# Altium PCB pcb_board4_final.PcbDoc
Units mil, origin at the board's own origin, x right, y up, seen from the top; angles counter-clockwise.
Board outline 2500 x 3000 mil, 4 copper layers (Top Layer, Int1 (GND), Int2 (GND), Bottom Layer), stack 53.912 mil thick; 87 components, 49 nets, 293 pads, 67 vias.
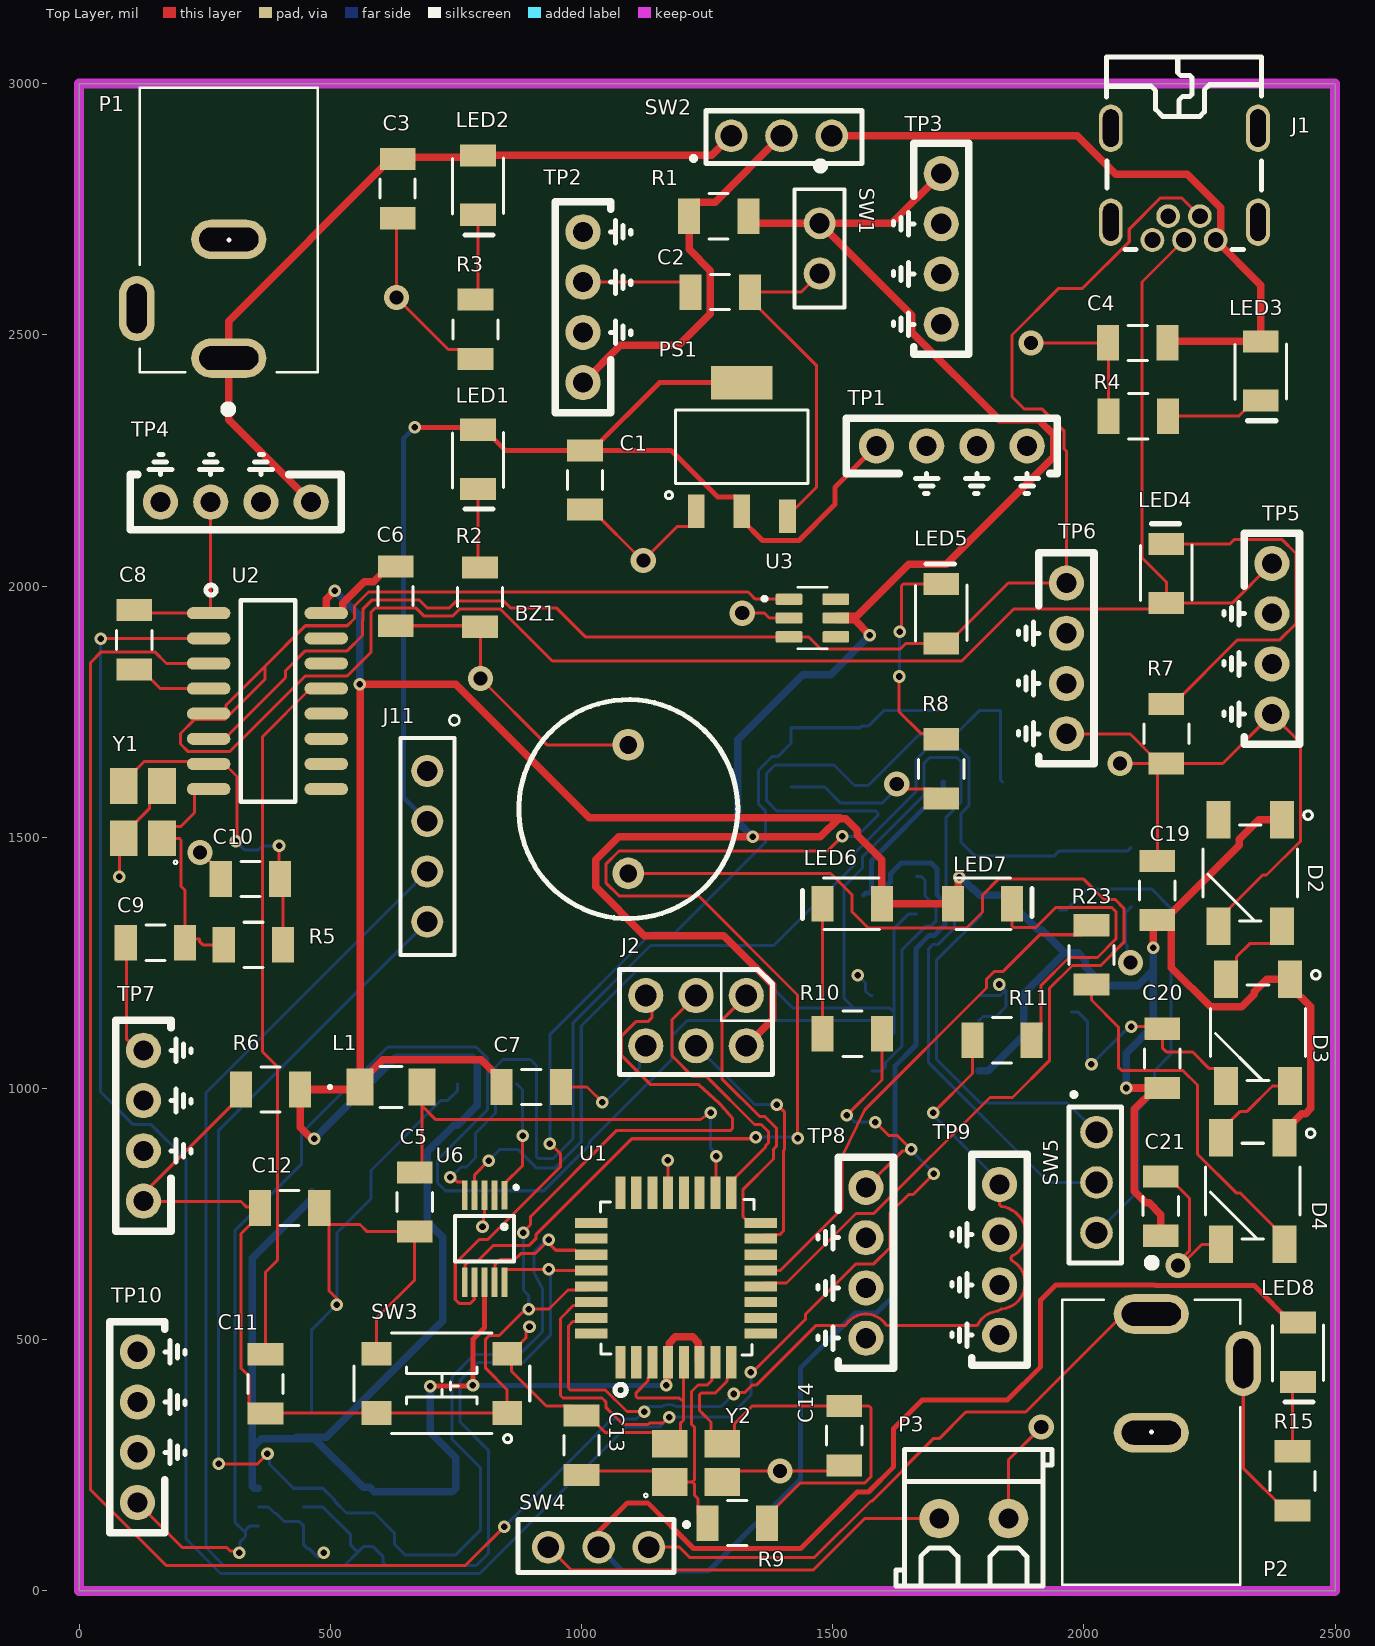
[diagram p0: Top Layer view]
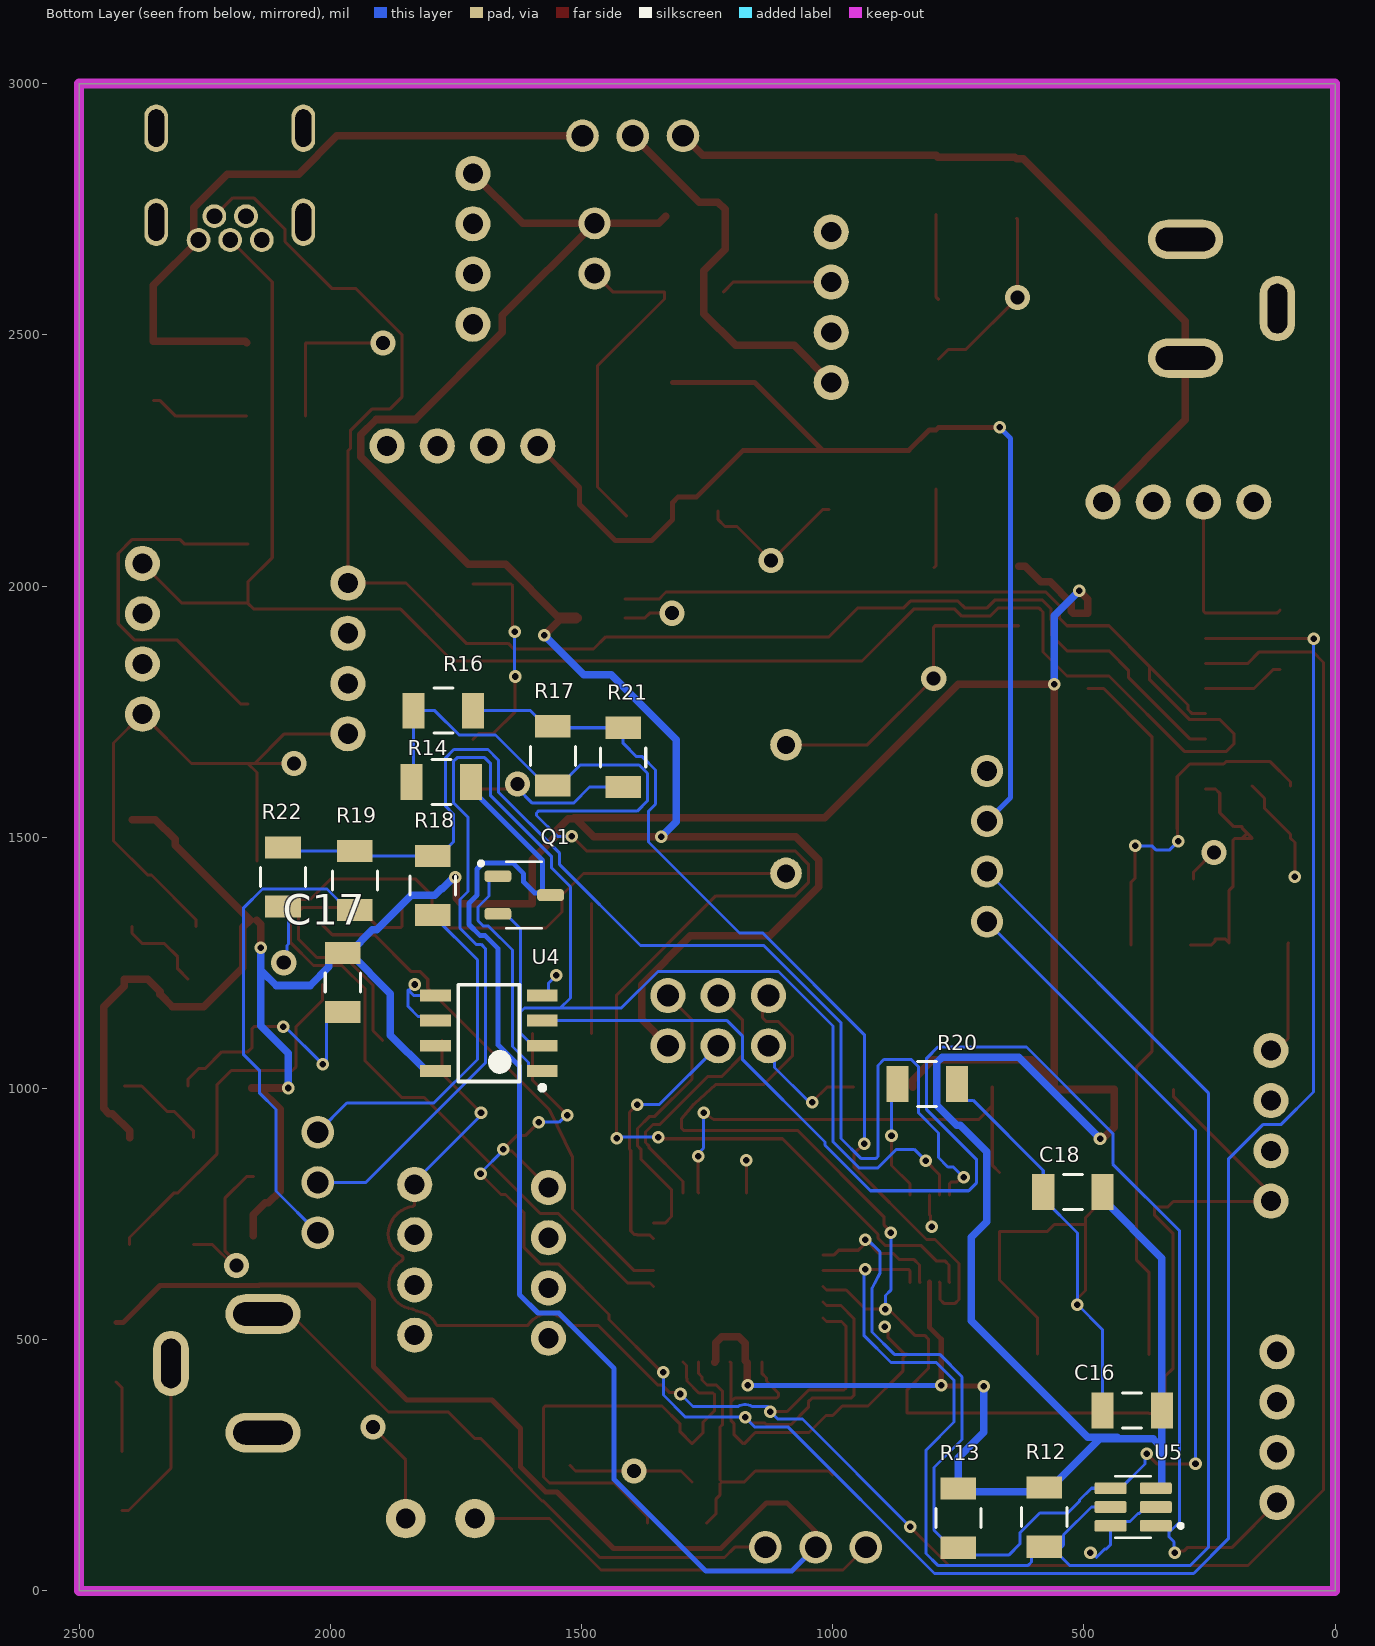
[diagram p1: Bottom Layer view, seen from below]
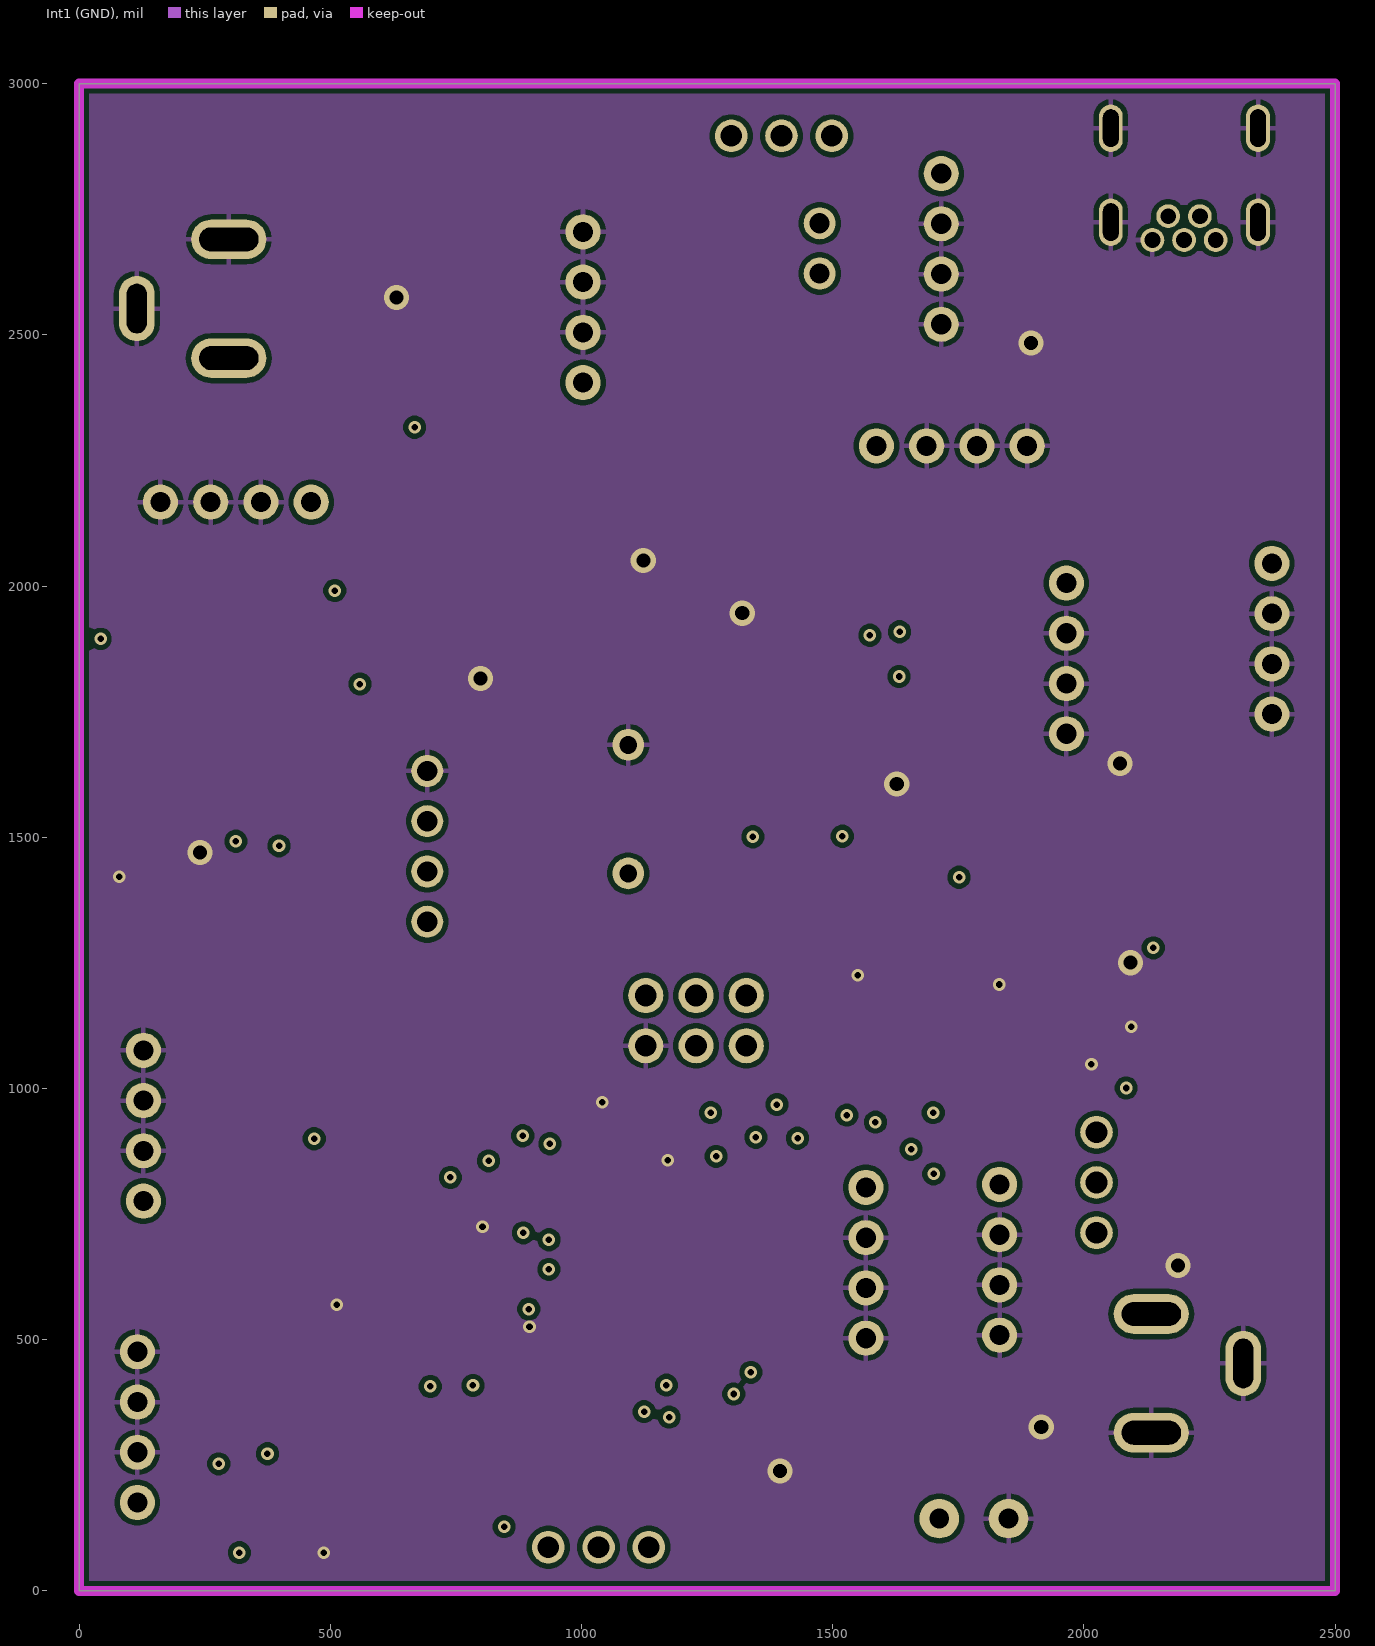
[diagram p2: Int1 (GND)]
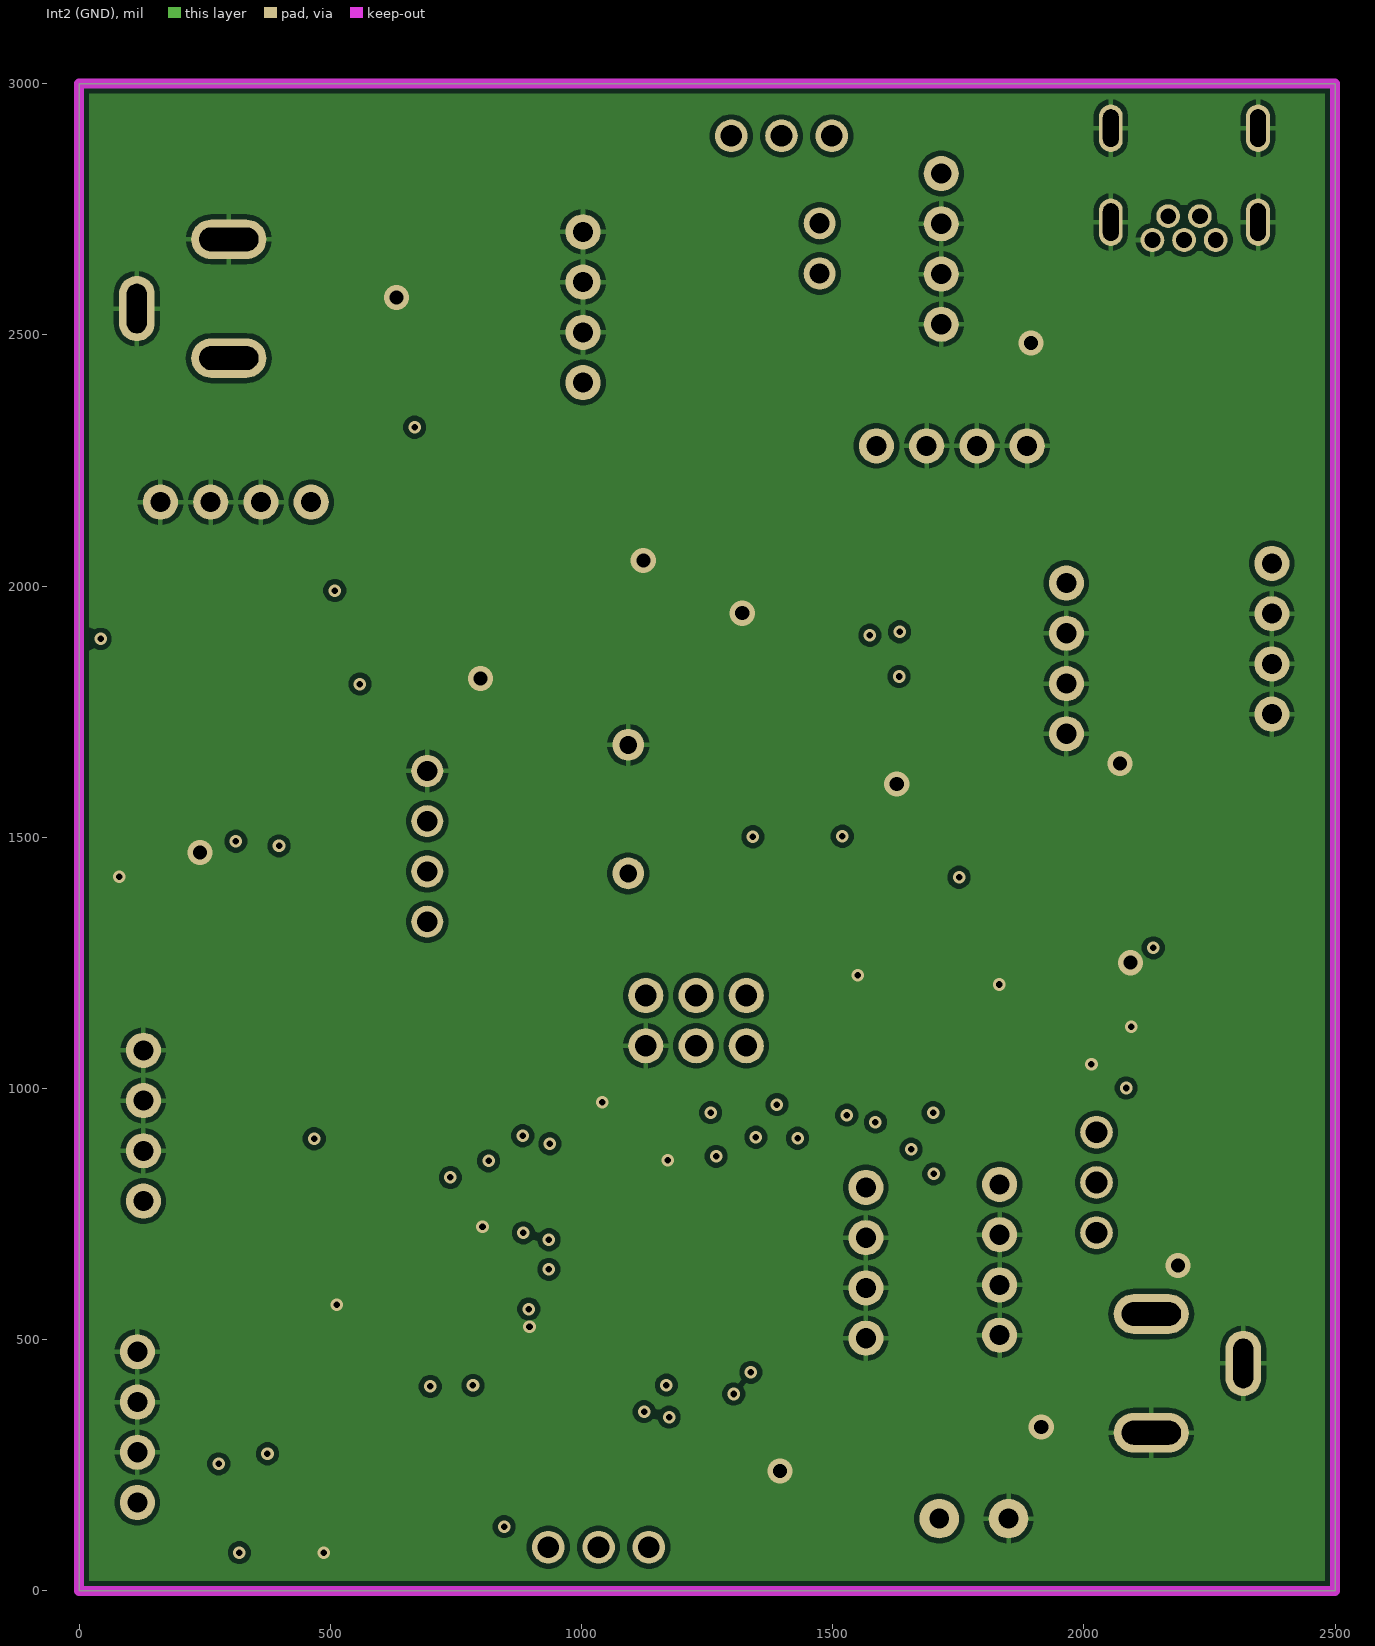
[diagram p3: Int2 (GND)]
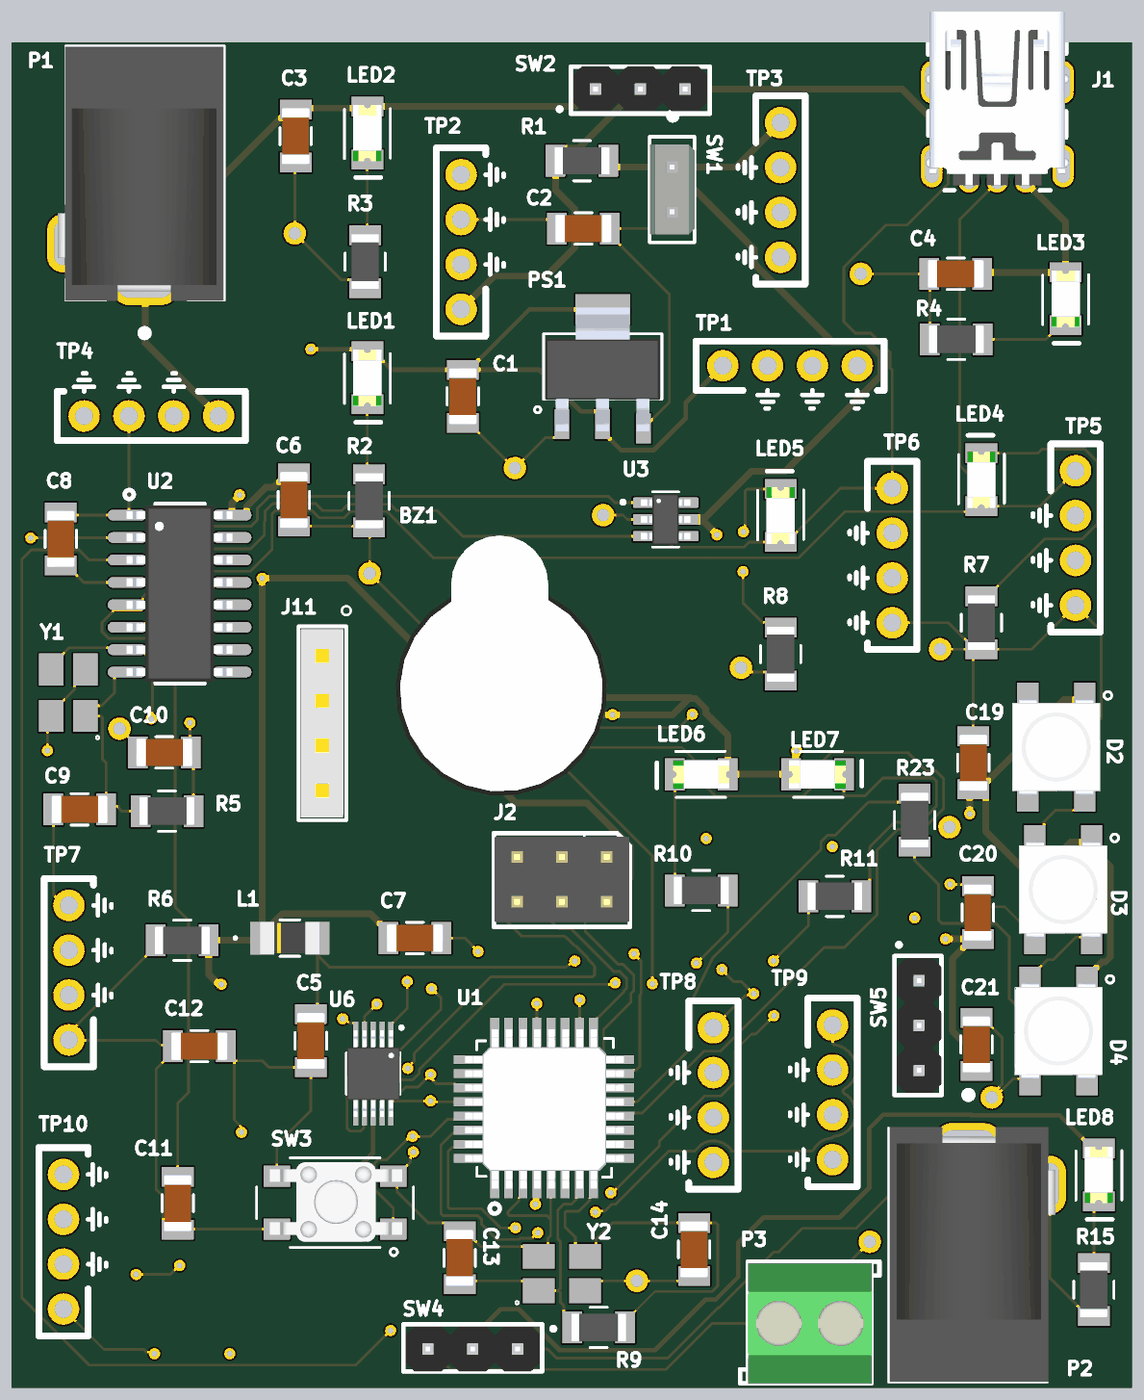
[diagram p4: 3D render of the assembled board from above, using the file's embedded part models]
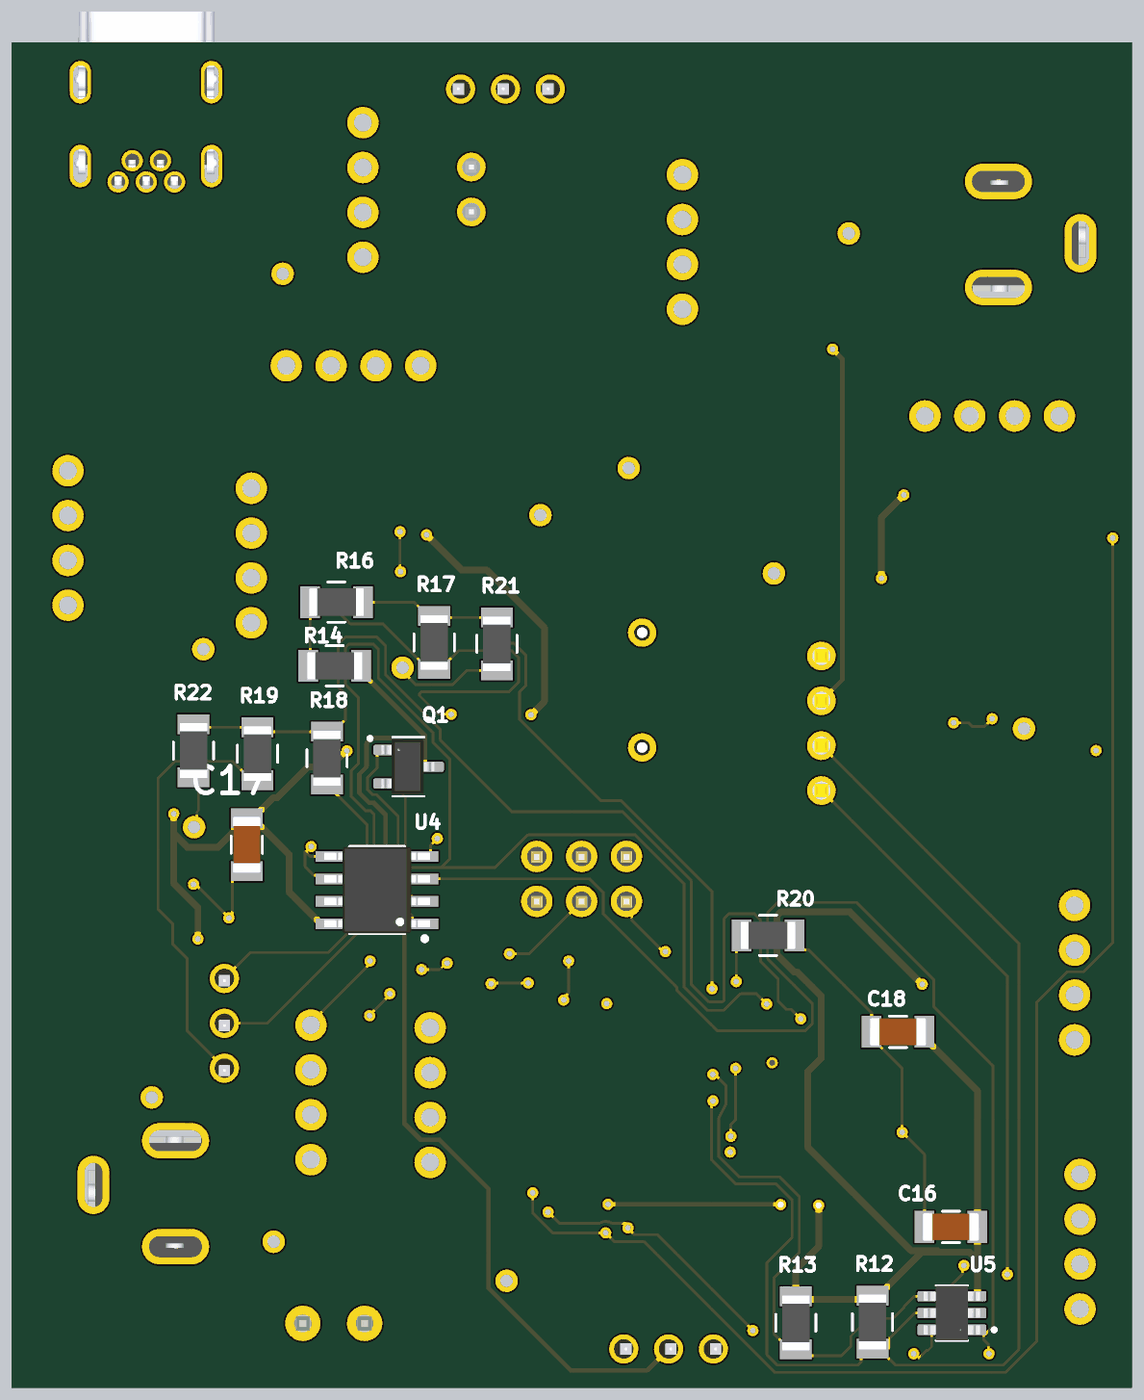
[diagram p5: 3D render of the assembled board from below, using the file's embedded part models]

## Layer stack, top to bottom
Top Solder: solder mask 1, SM-001, Dk 4
Top Layer: signal copper 1.378
Dielectric 1: prepreg 5.1, PP-017, Dk 4.3
Dielectric 2: prepreg 5.1, PP-017, Dk 4.3
Int1 (GND): signal copper 1.378
Dielectric 3: core 28, Core-039, Dk 4.8
Int2 (GND): signal copper 1.378
Dielectric 4: prepreg 5.1, PP-017, Dk 4.3
Dielectric 5: prepreg 5.1, PP-017, Dk 4.3
Bottom Layer: signal copper 1.378
Bottom Solder: solder mask 1, SM-001, Dk 4

## Board outline
0,0 2500,0 2500,3000 0,3000

## Design rules (kind name [scope] priority, off if disabled: settings)
BoardOutlineClearance [All] p1: gap=10 ignorepadtopadclearanceinfootprint=FALSE except(0: Arc-SplitContinuation Track-SplitContinuation SMDPad-SplitContinuation THPad-SplitContinuation Via-SplitContinuation Fill-SplitContinuation Poly-SplitContinuation Region-SplitContinuation Text-SplitContinuation)
Clearance [All] p1: gap=10 ignorepadtopadclearanceinfootprint=FALSE
PlaneClearance [All] p1: clearance=10
PlaneConnect [All] p1: planeconnectstyle=Direct reliefexpansion=20 reliefentries=4 reliefconductorwidth=10 reliefairgap=10
PolygonConnect [All] p1: thpad.connectstyle=Relief thpad.reliefconductorwidth=10 thpad.reliefentries=4 thpad.polygonreliefangle="90 Angle" thpad.airgapwidth=10 smdpad.connectstyle=Direct smdpad.reliefconductorwidth=10 smdpad.reliefentries=4 smdpad.polygonreliefangle="90 Angle" smdpad.airgapwidth=10 via.connectstyle=Direct via.reliefconductorwidth=10 via.reliefentries=4 via.polygonreliefangle="90 Angle" via.airgapwidth=10
RoutingVias [All] p1: holewidth=13 width=25 viastyle="Through Hole" minholewidth=13 minwidth=25 maxholewidth=60 maxwidth=80
SolderMaskExpansion [All] p1: expansion=4 istentingtop=FALSE
SupplyNets "Schematic Supply Nets_4" [InNet('5V_power_jack')] p1: voltage=0.000
SupplyNets "Schematic Supply Nets_3" [InNet('5V')] p2: voltage=0.000
SupplyNets "Schematic Supply Nets_2" [InNet('GND')] p3: voltage=0.000
SupplyNets "Schematic Supply Nets_1" [InNet('5V_USB')] p4: voltage=0.000
SupplyNets "Schematic Supply Nets" [InNet('3.3V')] p5: voltage=0.000
UnRoutedNet [All] p1: checkbadconnections=TRUE
Width "Schematic Width Constraint_5" [InNet('3.3V')] p1: maxlimit=100 minlimit=10 preferedwidth=20 midlayer1_maxwidth=10 midlayer1_prefwidth=10 midlayer2_maxwidth=10 midlayer2_prefwidth=10 minimp=50.000000 maximp=50.000000 favimp=50.000000
Width "Schematic Width Constraint_4" [InNet('NetR1_1')] p2: maxlimit=100 minlimit=10 preferedwidth=20 midlayer1_maxwidth=10 midlayer1_prefwidth=10 midlayer2_maxwidth=10 midlayer2_prefwidth=10 minimp=50.000000 maximp=50.000000 favimp=50.000000
Width "Schematic Width Constraint_3" [InNet('5V')] p3: maxlimit=100 minlimit=10 preferedwidth=20 midlayer1_maxwidth=10 midlayer1_prefwidth=10 midlayer2_maxwidth=10 midlayer2_prefwidth=10 minimp=50.000000 maximp=50.000000 favimp=50.000000
Width "Schematic Width Constraint_2" [InNet('5V_power_jack')] p4: maxlimit=100 minlimit=10 preferedwidth=20 midlayer1_maxwidth=10 midlayer1_prefwidth=10 midlayer2_maxwidth=10 midlayer2_prefwidth=10 minimp=50.000000 maximp=50.000000 favimp=50.000000
Width "Schematic Width Constraint_1" [InNet('5V_USB')] p5: maxlimit=100 minlimit=10 preferedwidth=20 midlayer1_maxwidth=10 midlayer1_prefwidth=10 midlayer2_maxwidth=10 midlayer2_prefwidth=10 minimp=50.000000 maximp=50.000000 favimp=50.000000
Width "Schematic Width Constraint" [InNet('v_thevenin')] p6: maxlimit=100 minlimit=10 preferedwidth=20 midlayer1_maxwidth=10 midlayer1_prefwidth=10 midlayer2_maxwidth=10 midlayer2_prefwidth=10 minimp=50.000000 maximp=50.000000 favimp=50.000000
Width [All] p7: maxlimit=10 minlimit=6 preferedwidth=10 toplayer_maxwidth=6 toplayer_prefwidth=6 midlayer1_minwidth=10 midlayer2_minwidth=10 bottomlayer_maxwidth=6 bottomlayer_prefwidth=6 minimp=50.000000 maximp=50.000000 favimp=50.000000
27 further rules are at their usual default settings.

## Classes and differential pairs
component class Sheet3: BZ1 C16 C17 C18 C19 C20 C21 D2 D3 D4 J11 LED8 P2 P3 Q1 R12 R13 R14 R15 R16 R17 R18 R19 R20 R21 R22 R23 SW4 SW5 TP10 U4 U5 U6
component class Sheet2: C1 C2 C3 C4 C5 C6 C7 C8 C9 C10 C11 C12 C13 C14 J1 J2 L1 LED1 LED2 LED3 LED4 LED5 LED6 LED7 P1 PS1 R1 R2 R3 R4 R5 R6 R7 R8 R9 R10 R11 SW1 SW2 SW3 TP1 TP2 TP3 TP4 TP5 TP6 TP7 TP8 TP9 U1 U2 U3 Y1 Y2

## Components (designator, comment, footprint, x,y, rotation, side; value= is the part's Value field where it differs from the comment)
BZ1 "AT-1224-TWT-5V-2-R" "BUZZER- TH" 1093,1556 r0 top
C1 "22uF" 1206_Passive_Capacitor 1007,2211 r90 top
C2 "22uF" 1206_Passive_Capacitor 1276,2585 r0 top
C3 "22uF" 1206_Passive_Capacitor 634,2791 r90 top
C4 "22uF" 1206_Passive_Capacitor 2107,2484 r0 top
C5 "22uF" 1206_Passive_Capacitor 668,774 r90 top
C6 "22uF" 1206_Passive_Capacitor 630,1980 r90 top
C7 "22uF" 1206_Passive_Capacitor 900,1003 r180 top
C8 "1uF" 1206_Passive_Capacitor 110,1893 r270 top
C9 "22pF" 1206_Passive_Capacitor 152,1290 r0 top
C10 "22pF" 1206_Passive_Capacitor 341,1417 r0 top
C11 "22uF" 1206_Passive_Capacitor 371,412 r270 top
C12 "1uF" 1206_Passive_Capacitor 419,762 r180 top
C13 "22pF" 1206_Passive_Capacitor 1000,290 r270 top
C14 "22pF" 1206_Passive_Capacitor 1523,309 r90 top
C16 "22uF" 1206_Passive_Capacitor 404,359 r180 bottom
C17 "22uF" 1206_Passive_Capacitor 1975,1211 r90 bottom
C18 "22uF" 1206_Passive_Capacitor 522,794 r180 bottom
C19 "22uF" 1206_Passive_Capacitor 2146,1394 r90 top
C20 "22uF" 1206_Passive_Capacitor 2156,1060 r90 top
C21 "22uF" 1206_Passive_Capacitor 2153,766 r90 top
D2 "IN-PI55QATPRPGPBPW" "SERIAL_LED - duplicate" 2331,1429 r270 top
D3 "IN-PI55QATPRPGPBPW" "SERIAL_LED - duplicate" 2346.5,1111.3 r270 top
D4 "IN-PI55QATPRPGPBPW" "SERIAL_LED - duplicate" 2336,796 r270 top
J1 "USB Mini" USB_MINI_B 2200,2800 r180 top value="USB mini B"
J2 "NRPN032PAEN-RC" ICSP 1328,1185 r270 top
J11 "SAMTEC-SSQ-104-01-X-SJ" JF-4_SSQ-104-01-X-S 693,1482 r270 top
L1 "FB_10uH_1206" AIML-1206_ABR-M 621,1003 r0 top
LED1 "Blue" LED_1206 794,2252 r270 top
LED2 "Green" LED_1206 794,2798 r270 top
LED3 "Blue" LED_1206 2352,2428 r270 top
LED4 "Blue" LED_1206 2164,2025 r90 top
LED5 "Blue" LED_1206 1716,1945 r90 top
LED6 "Blue" LED_1206 1539,1368 r180 top
LED7 "Blue" LED_1206 1798,1368 r0 top
LED8 "Blue" LED_1206 2426,475 r270 top
P1 "Power Jack" Power_Jack 298,2453.78 r90 top value="CONN PWR JACK 2X5.5MM SOLDER"
P2 "Power Jack" Power_Jack 2134,551.22 r270 top value="CONN PWR JACK 2X5.5MM SOLDER"
P3 "2P Screw Terminal Block" "P_Terminal block 3.5mm-pitch" 1781,144 r0 top
PS1 "AMS1117-3.3" LDO 1319,2277 r0 top value="IC REG LINEAR 3.3V 800MA SOT223"
Q1 "AO3400A" N-MOSFET 1614,1385 r180 bottom value="N channel"
R1 "500m" 1206_Passive_Resitor 1273,2736 r0 top value=500mOhm
R2 "1k" 1206_Passive_Resitor 798,1978 r90 top value="1K Ohm"
R3 "1k" 1206_Passive_Resitor 789,2511 r90 top value="1K Ohm"
R4 "1k" 1206_Passive_Resitor 2108,2338 r0 top value="1K Ohm"
R5 "1M" 1206_Passive_Resitor 347,1286 r0 top value="1M Ohm"
R6 "10k" 1206_Passive_Resitor 381,998 r0 top value=10KOhm
R7 "1k" 1206_Passive_Resitor 2164,1706 r90 top value="1K Ohm"
R8 "1k" 1206_Passive_Resitor 1716,1636 r90 top value="1K Ohm"
R9 "1M" 1206_Passive_Resitor 1310,135 r0 top value="1M Ohm"
R10 "1k" 1206_Passive_Resitor 1539,1109 r180 top value="1K Ohm"
R11 "1k" 1206_Passive_Resitor 1837,1096 r0 top value="1K Ohm"
R12 "10k" 1206_Passive_Resitor 579,147 r270 bottom value=10KOhm
R13 "10k" 1206_Passive_Resitor 750,145 r90 bottom value=10KOhm
R14 "10k" 1206_Passive_Resitor 1779,1610 r180 bottom value=10KOhm
R15 "1k" 1206_Passive_Resitor 2415,219 r90 top value="1K Ohm"
R16 "10k" 1206_Passive_Resitor 1775,1752 r0 bottom value=10KOhm
R17 "10k" 1206_Passive_Resitor 1557,1662 r270 bottom value=10KOhm
R18 "1 Ohm" 1206_Passive_Resitor 1796,1404 r270 bottom value=1Ohm
R19 "10 Ohm" 1206_Passive_Resitor 1951,1414 r270 bottom
R20 "10k" 1206_Passive_Resitor 812,1009 r0 bottom value=10KOhm
R21 "0 Ohm" 1206_Passive_Resitor 1417,1659 r90 bottom
R22 "0 Ohm" 1206_Passive_Resitor 2094,1421 r90 bottom
R23 "10k" 1206_Passive_Resitor 2015,1266 r90 top value=10KOhm
SW1 "SW_2Pin_100mil_Switch" 2Pin-Header-Conn 1474,2722 r270 top
SW2 "PREC003SAAN-RC" 3_PIN_100mil 1298,2896 r0 top value="CONN HEADER VERT 3POS 2.54MM"
SW3 "TL3305AF160QG" Switch_JLC 722,413 r180 top
SW4 "PREC003SAAN-RC" 3_PIN_100mil 1134,87 r180 top value="CONN HEADER VERT 3POS 2.54MM"
SW5 "PREC003SAAN-RC" 3_PIN_100mil 2025,913 r270 top value="CONN HEADER VERT 3POS 2.54MM"
TP1 "" TP10x_Probe 1737,2279 r0 top
TP2 "" TP10x_Probe 1003,2555 r90 top
TP3 "" TP10x_Probe 1716,2671 r270 top
TP4 "TP_5V" TP10x_Probe 312,2167 r180 top
TP5 "10x Probe TP" TP10x_Probe 2374,1895 r270 top
TP6 "10x Probe TP" TP10x_Probe 1965,1856 r270 top
TP7 "10x Probe TP" TP10x_Probe 128,926 r90 top
TP8 "10x Probe TP" TP10x_Probe 1566,653 r270 top
TP9 "10x Probe TP" TP10x_Probe 1832,659 r270 top
TP10 "10x Probe TP" TP10x_Probe 116,326 r90 top
U1 "ATMEGA328P-ANR" ATMega328P 1188,624 r270 top value="IC MCU 8BIT 32KB FLASH 32TQFP"
U2 "CH340G" "USB to serial" 375,1771 r270 top value="USB to Serial"
U3 "TESD5V0V4UCX6_RFG" SOT95P280X145-6N 1459.65,1936.4 r0 top
U4 "MCP6002T-I/SN" SOIC127P600X175-8N 1684.3,1110 r0 bottom
U5 "DAC IC" MCP4725 402,167 r0 bottom
U6 "ADS1115IDGSR" ADC_ADS1115IDGSR 807,701 r270 top
Y1 "X322512MSB4SI" "Crystal resonator" 125,1550 r90 top value=12MHz
Y2 "X322516MLB4SI" "Crystal resonator" 1228,257 r0 top value=16MHz

## Footprints (in the part's own frame and the unit in brackets; to place one, negate y for a bottom-side part, rotate by r counter-clockwise, add the part's x,y. Pads: shape width x height; smd on the part's side, far side on the other; paste and mask are expansions set on the pad)
2Pin-Header-Conn [mm]
  round 1.62 hole 1.02: 1(0,0) 2(2.54,0)
  silkscreen extent -3.03,-1.27 4.26,1.26, body extent -1.27,-1.27 3.81,1.27, height 8.13
3_PIN_100mil [mm]
  round 1.65 hole 1.1: 1(0,0) 2(2.54,0) 3(5.08,0)
  silkscreen extent -2,-1.4 6.6,1.27, body extent -1.14,-1.27 6.48,1.27, height 8.38
1206_Passive_Capacitor [mil]
  rect 44x71 smd: 1(-59,0) 2(59,0)
  silkscreen extent -19,-35 19,35, body extent -63,-31 63,32, height 50
1206_Passive_Resitor [mil]
  rect 44x71 smd: 1(-59,0) 2(59,0)
  silkscreen extent -19,-45 19,45, body extent -61,-31 61,31, height 26
ADC_ADS1115IDGSR [mm] "*SOP50P490X110-10N"
  rect 1.45x0.3 smd mask+0.025: 1(-2.2,1)
  rect 1.47x0.3 smd mask+0.025: 2(-2.2,0.5) 3(-2.2,0) 4(-2.2,-0.5) 5(-2.2,-1) 6(2.2,-1) 7(2.2,-0.5) 8(2.2,0) 9(2.2,0.5) 10(2.2,1)
  silkscreen extent -2.68,-1.5 1.15,1.68, body extent -2.44,-1.49 2.46,1.51, height 1.1
AIML-1206_ABR-M [mil]
  rect 54x73 smd paste+0 mask+0: 1(-61.5,0) 2(61.5,0)
  silkscreen extent -124,-40 22,40, body extent -66,-36 66,36, height 55
ATMega328P [mm]
  rect 1.65x0.508 smd mask+0.025: 1(4.28,-2.794) 2(4.28,-2.007) 3(4.28,-1.194) 4(4.28,-0.406) 5(4.28,0.406) 6(4.28,1.194) 7(4.28,2.007) 8(4.28,2.794) 17(-4.28,2.794) 18(-4.28,2.007) 19(-4.28,1.194) 20(-4.28,0.406) 21(-4.28,-0.406) 22(-4.28,-1.194) 23(-4.28,-2.007) 24(-4.28,-2.794)
  rect 0.508x1.65 smd mask+0.025: 9(2.843,4.28) 10(2.056,4.28) 11(1.243,4.28) 12(0.455,4.28) 13(-0.357,4.28) 14(-1.145,4.28) 15(-1.958,4.28) 16(-2.745,4.28) 25(-2.745,-4.28) 26(-1.958,-4.28) 27(-1.145,-4.28) 28(-0.357,-4.28) 29(0.455,-4.28) 30(1.243,-4.28) 31(2.056,-4.28) 32(2.843,-4.28)
  silkscreen extent -3.94,-3.81 5.97,3.94, body extent -4.45,-4.47 4.55,4.53, height 1.16
"BUZZER- TH" [mm]
  round 1.6 hole 0.9: 1(0,3.25) 2(0,-3.25)
  silkscreen extent -5.53,-5.54 5.54,5.54, body extent -6,-6 6,8.75, height 9.05
"Crystal resonator" [mm]
  rect 1.8x1.4 smd: 1(-1.32,-1.02) 2(1.32,-1.02) 3(1.32,0.92) 4(-1.32,0.92)
  silkscreen extent -2.63,-1.79 -2.45,-1.61, body extent -1.65,-1.2 1.65,1.2, height 0.8
ICSP [mil]
  round 70 hole 43.31: 1(0,0) 2(0,-100) 3(0,-200) 4(100,0) 5(100,-100) 6(100,-200)
  silkscreen extent -52,-252 157,52, body extent -44,-250 146,50, height 330
JF-4_SSQ-104-01-X-S [mm]
  round 1.62 hole 1.02: 1(-3.81,0) 2(-1.27,0) 3(1.27,0) 4(3.81,0)
  silkscreen extent -6.63,-1.35 5.49,1.63, body extent -5.33,-1.21 5.33,1.21, height 8.51
LDO [mm]
  rect 0.838x1.7 smd: 1(-2.311,-3.25) 2(0,-3.25) 3(2.311,-3.5)
  rect 3.099x1.7 smd: 4(0,3.25)
  silkscreen extent -3.86,-2.62 3.35,1.85, body extent -3.25,-3.65 3.25,3.35, height 1.85
LED_1206 [mil]
  rect 44x71 smd: 1(-59,0) 2(59,0)
  silkscreen extent -54,-51 99,51, body extent -63,-31 63,31, height 28
MCP4725 [mm]
  rrect25% 1.61x0.59 smd: 1(-1.145,0.95) 2(-1.145,0) 3(-1.145,-0.95) 4(1.145,-0.95) 5(1.145,0) 6(1.145,0.95)
  silkscreen extent -2.5,-1.56 0.9,1.56, body extent -1.6,-1.55 1.6,1.55, height 1.45
N-MOSFET [mm]
  rrect50% 1.35x0.59 smd: 1(-1.33,0.95) 2(-1.33,-0.95) 3(1.33,0)
  silkscreen extent -2.28,-1.68 0.89,1.7, body extent -1.55,-1.55 1.45,1.55, height 1.25
"P_Terminal block 3.5mm-pitch" [mm]
  round 2 hole 1: 1(-1.75,0) 2(1.75,0)
  silkscreen extent -3.95,-3.4 3.95,3.5, body extent -3.5,-3.4 3.5,3.4, height 8.4
Power_Jack [mm]
  oval 2x3.8 hole 1.2 slot 3 at 90 deg: 1(0,0) 2(6,0)
  oval 3.3x1.8 hole 1 slot 2.5 at 0 deg: 3(2.5,4.65)
  silkscreen extent -2.79,-4.5 13.68,4.5, body extent -0.76,-4.45 13.64,4.95, height 11.49
"SERIAL_LED - duplicate" [mil] "Footprint for serial LED"
  rect 74.8x47.5 smd: 1(-106.3,63.5) 2(-106.3,-63.5) 3(106.3,-63.5) 4(106.3,63.5)
  silkscreen extent -124,-94 95,124, body extent -106,-98 106,98, height 63
SOIC127P600X175-8N [mm] "SOIC, 8-Leads, Body 4.90x3.90mm, Pitch 1.27mm, IPC Medium Density"
  rect 1.55x0.6 smd: 1(-2.7,1.905) 2(-2.7,0.635) 3(-2.7,-0.635) 4(-2.7,-1.905) 5(2.7,-1.905) 6(2.7,-0.635) 7(2.7,0.635) 8(2.7,1.905)
  silkscreen extent -2.82,-2.45 1.55,2.88, body extent -3,-2.45 3,2.45, height 1.75
SOT95P280X145-6N [mm]
  rrect25% 1.35x0.58 smd: 1(-1.185,0.95) 2(-1.185,0) 3(-1.185,-0.95) 4(1.185,-0.95) 5(1.185,0) 6(1.185,0.95)
  silkscreen extent -2.52,-1.57 0.75,1.57, body extent -1.4,-1.45 1.4,1.45, height 1.45
Switch_JLC [mm]
  rect 1.5x1.2 smd: 1(-3.3,1.5) 2(3.3,1.5) 3(-3.3,-1.5) 4(3.3,-1.5)
  silkscreen extent -4.44,-2.54 4.45,3, body extent -3.8,-2.29 3.7,2.21, height 3.7
TP10x_Probe [mil] "Small Probs footprint"
  round 70 hole 40: 1(-150,0) 2(-50,0) 2(50,0) 2(150,0)
  silkscreen extent -210,-95 210,55
"USB to serial" [mil]
  oval 24x86.61 smd: 1(-175,-117) 2(-125,-117) 3(-75,-117) 4(-25,-117) 5(25,-117) 6(75,-117) 7(125,-117) 8(175,-117) 9(175,117) 10(125,117) 11(75,117) 12(25,117) 13(-25,117) 14(-75,117) 15(-125,117) 16(-175,117)
  silkscreen extent -231,-122 201,56, body extent -197,-118 197,118, height 71
USB_MINI_B [mm]
  round 1.2 hole 0.8: 1(-1.58,2.826) 2(-0.78,1.622) 3(0.02,2.826) 4(0.82,1.622) 5(1.62,2.826)
  oval 1.2x2.4 hole 0.8 slot 1.9 at 90 deg: 6(-3.72,1.924) 7(3.72,1.924) 8(-3.72,-2.826) 9(3.72,-2.826)
  silkscreen extent -3.89,-6.42 3.93,3.3, body extent -4.04,-6.83 4.06,3.02, height 3.98

## Part data
BZ1: library part BUZZER_1, "Buzzers Transducer, Externally Driven Electromechanical/Magnetic 5 V 40mA 2.4kHz 87dB @ 5V, 10cm Through Hole PC Pins", Datasheet=https://www.puiaudio.com/media/SpecSheet/AT-1224-TWT-5V-2-R.pdf, MFR Part #=AT-1224-TWT-5V-2-R
C1 C2 C3 C4 C5 C6 C7 C11 C16 C17 C18 C19 C20 C21: library part C_22uF_1206, "22uF ±10% 25V X5R 1206 Multilayer Ceramic Capacitors MLCC - SMD/SMT RoHS", LCSC Part#=C12891, MFR Part #=CL31A226KAHNNNE, Datasheet=https://datasheet.lcsc.com/lcsc/1811031514_Samsung-Electro-Mechanics-CL31A226KAHNNNE_C12891.pdf, Type=basic
C8 C12: library part C_1uF_1206, "MULTILAYER CERAMIC CAPACITORS MLCC - SMD/SMT 1UF 50V 1206 ROHS", LCSC Part#=C1848, MFR Part #=CL31B105KBHNNNE, Digikey Link=https://www.digikey.com/product-detail/en/C1206C105M4RACTU/399-8150-1-ND/3471873/?itemSeq=304982366, Type=Basic
C9 C10 C13 C14: library part C_22pF_1206, "22pF ±5% 1kV C0G 1206 Multilayer Ceramic Capacitors MLCC - SMD/SMT RoHS", LCSC Part#=C107174, MFR Part #=CC1206JKNPOCBN220, Datasheet=https://datasheet.lcsc.com/lcsc/1810241219_YAGEO-CC1206JKNPOCBN220_C107174.pdf, Type=Extended
D2 D3 D4: library part LED_Smart, "LIGHT EMITTING DIODES (LED) RGB 620~630NM RED, 520~530NM GREEN, 465~475NM BLUE 600MCD@16MARED,1200MCD@16MAGREEN,300MCD@16MABLUE TOP VIEW SMD-4 ROHS", LCSC Part#=C2843785, Manufacturer=XINGLIGHT, MFR Part #=XL-5050RGBC-WS2812B, Datasheet=https://datasheet.lcsc.com/lcsc/2301111130_XINGLIGHT-XL-5050RGBC-WS2812B_C2843785.pdf
J1: library part J_USB_B_Mini, "Through Hole USB Connectors RoHS", LCSC Part#=C46398, MFR Part #=920-462A2021D10102, Datasheet=https://datasheet.lcsc.com/szlcsc/2103081233_Jing-Extension-of-the-Electronic-Co-920-462A2021D10102_C46398.pdf, Type=Extended
J2: library part J_ICSP, "Connector Header Through Hole 6 position 0.079\" (2.00mm)", LCSC Part#=C124384, Digikey Link=https://www.digikey.com/product-detail/en/NRPN032PAEN-RC/S5801-03-ND/804955/?itemSeq=304982355, MFR Part #=NRPN032PAEN-RC, Type=Extended
J11: library part JF_4_PIN_FEMALE, "2.54mm 3A bronze -40℃~+105℃ Straight 1x4P Top 4 1 Square Holes Straight,P=2.54mm  Female Headers ROHS", LCSC Part#=C2718488, MFR Part #=SSQ-104-01-X-SJ
L1: "25mA 10uH ±10% 800mΩ 1206  Inductors (SMD) ROHS", LCSC Part#=C1051, MFR Part #=CMI321609X100KT, Mfr_Name="FH (Guangdong Fenghua Advanced Tech)", Datasheet=https://datasheet.lcsc.com/lcsc/1810311314_FH--Guangdong-Fenghua-Advanced-Tech-CMI321609X100KT_C1051.pdf, Type=Basic
LED1 LED3 LED4 LED5 LED6 LED7 LED8: library part LED_BLUE_1206, "blue 1206  Light Emitting Diodes (LED) ROHS", LCSC Part#=C130717, MFR Part #=NCD1206B1, Datasheet=https://datasheet.lcsc.com/lcsc/2008201033_Foshan-NationStar-Optoelectronics-NCD1206B1_C130717.pdf, Type=Extended
LED2: library part LED_GREEN_1206, "Green 513~528nm 1206 Light Emitting Diodes (LED) RoHS", LCSC Part#=C434439, MFR Part #=SZYY1206G, Datasheet=https://datasheet.lcsc.com/lcsc/2006301532_Yongyu-Photoelectric-SZYY1206G_C434439.pdf, Type=Extended
P1 P2: library part "P_Power Jack", "Power Barrel Connector Jack 2.10mm ID (0.083\"), 5.50mm OD (0.217\") Through Hole, Right Angle", LCSC Part#=C136744, MFR Part #=PJ-102A, Digikey Link=https://www.digikey.com/product-detail/en/PJ-102A/CP-102A-ND/275425/?itemSeq=304982367, Type=Extended
P3: library part "P_Terminal block", "Green Straight pin 3.5mm  pitch; P=3.5mm  Screw terminal ROHS", LCSC Part#=C474892, Manufacturer="Cixi Kefa Elec", MFR Part #=KF350-3.5-2P, Datasheet=https://datasheet.lcsc.com/lcsc/2001160007_Cixi-Kefa-Elec-KF350-3-5-2P_C474892.pdf
PS1: library part PS_AMS_LDO_3v3, "LOW DROPOUT REGULATORS(LDO) POSITIVE FIXED 1.3V @ 800MA 15V 3.3V 1A SOT-223 ROHS", LCSC Part#=C6186, MFR Part #=AMS1117-3.3, Type=Basic
Q1: library part Q_Nch_MOSFET, "MOSFET N Trench 30V 5.7A 1.5V @ 250uA 26.5 m? @ 5.7A,10V SOT-23-3L RoHS", LCSC Part#=C20917, Datasheet=https://datasheet.lcsc.com/szlcsc/Alpha-Omega-Semicon-AOS-AO3400A_C20917.pdf, MFR Part #=AO3400A, Type=Basic
R1: library part R_500mOhm_1206, "Resistors/Shunt 250mW 500mΩ ±800ppm/℃ ±5% 1206  Current Sense  Resistors ROHS", LCSC Part#=C247433, MFR Part #=1206W4J050KT5E, Datasheet=https://datasheet.lcsc.com/lcsc/1810301438_UNI-ROYAL-Uniroyal-Elec-1206W4J050KT5E_C247433.pdf, Type=Extended
R2 R3 R4 R7 R8 R10 R11 R15: library part R_1K_1206, "CHIP RESISTOR - SURFACE MOUNT 1KOHMS ±1% 1/4W 1206 ROHS", LCSC Part#=C4410, MFR Part #=RNCP1206FTD1K00CT, Digikey Link=https://www.digikey.com/product-detail/en/RNCP1206FTD1K00/RNCP1206FTD1K00CT-ND/2240675/?itemSeq=304982373, Type=Basic
R5 R9: library part R_1M_1206, "CHIP RESISTOR - SURFACE MOUNT 1MOHMS ±1% 1/4W 1206 ROHS", LCSC Part#=C17927, MFR Part #=RMCF1206JT1M00, Digikey Link=https://www.digikey.com/product-detail/en/RMCF1206JT1M00/RMCF1206JT1M00CT-ND/1942830/?itemSeq=304982358, Type=Basic
R6 R12 R13 R14 R16 R17 R20 R23: library part R_10KOhm_1206, "10 kOhms ±5% 0.25W, 1/4W Chip Resistor 1206 (3216 Metric) Automotive AEC-Q200 Thick Film", LCSC Part#=C17902, MFR Part #=RMCF1206FT10K0, Digikey Link=https://www.digikey.com/en/products/detail/stackpole-electronics-inc/RMCF1206FT10K0/1759669, Type=Basic
R18: library part R_1Ohm_1206, "1Ω ±5% 0.25W ±400ppm/℃ 1206 Chip Resistor - Surface Mount RoHS", LCSC Part#=C1409, MFR Part #=1206W4J010JT5E, Datasheet=https://datasheet.lcsc.com/lcsc/1810301410_UNI-ROYAL-Uniroyal-Elec-1206W4J010JT5E_C1409.pdf, Type=Extended
R19: library part R_10Ohm_1206, "CHIP RESISTOR - SURFACE MOUNT 0.1OHMS ±1% 1/4W 1206 ROHS", LCSC Part#=C17903, MFR Part #=1206W4F100JT5E, Datasheet=https://datasheet.lcsc.com/szlcsc/Uniroyal-Elec-1206W4F100JT5E_C17903.pdf, Type=Basic
R21 R22: library part R_0Ohm_1206, "CHIP RESISTOR - SURFACE MOUNT 0OHMS ±1% 1/4W 1206 ROHS", LCSC Part#=C17888, MFR Part #=1206W4F0000T5E, Datasheet=https://datasheet.lcsc.com/szlcsc/Uniroyal-Elec-1206W4F0000T5E_C17888.pdf, Mouser link=https://www.mouser.com/ProductDetail/Royalohm/1206W4F0000T5E?qs=e8oIoAS2J1Thbopin%252BsagQ%3D%3D, Type=Basic
SW1: "2Pin Header", LCSC Part#=C124375, Type=Extended
SW2 SW4 SW5: library part SW_3Pin_100mil_Switch, "Connector Header Through Hole 3 position 0.100\" (2.54mm)", LCSC Part#=C49257, Digikey Link=https://www.digikey.com/product-detail/en/PREC003SAAN-RC/S1012EC-03-ND/2774851/?itemSeq=304982371, MFR Part #=PREC003SAAN-RC, Type=Extended
SW3: library part SW_Push_Button_JLC, "Tactile Switch SPST-NO Top Actuated Surface Mount", LCSC Part#=C2837550, MFR Part #=KH-4.5X4.5X4.3H-STM, Datasheet=https://datasheet.lcsc.com/lcsc/2106081532_Shenzhen-Kinghelm-Elec-KH-4.5X4.5X4.3H-STM_C2837550.pdf, Type=Extended
TP1 TP2 TP3 TP4 TP5 TP6 TP7 TP8 TP9 TP10: library part TP_10x_Probe, "Test Point 300 mil centers"
U1: library part U_ATMega328P, "AVR AVR® ATmega Microcontroller IC 8-Bit 20MHz 32KB (16K x 16) FLASH 32-TQFP (7x7)", LCSC Part#=C14877, MFR Part #=ATMEGA328P-AU, Digikey Link=https://www.digikey.com/product-detail/en/ATMEGA328P-ANR/ATMEGA328P-ANRCT-ND/2774230/?itemSeq=304982365, Type=Basic
U2: library part U_USBtoSerial, "Transceiver USB 2.0 2Mbps SOP-16_150mil USB ICs RoHS", LCSC Part#=C14267, Datasheet=https://datasheet.lcsc.com/lcsc/2008191806_WCH-Jiangsu-Qin-Heng-CH340G_C14267.pdf, MFR Part #=CH340G, Type=Basic
U3: "SOT-26, 5V, 75W, 0.6pF, ESD Protection", Package=None, Check_prices=https://www.snapeda.com/parts/TESD5V0V4UCX6%20RFG/Taiwan+Semiconductor/view-part/?ref=eda, MF="Taiwan Semiconductor", MP="TESD5V0V4UCX6 RFG", SnapEDA_Link=https://www.snapeda.com/parts/TESD5V0V4UCX6%20RFG/Taiwan+Semiconductor/view-part/?ref=snap
U4: library part U_MCP6002T-I/SN, "0.6 V/us 2 1MHz 1.8V ~ 6V 100μA General Purpose SOIC-8_150mil  Operational Amplifier ROHS", LCSC Part#=C7377, Mfr=Microchip, Datasheet=https://ww1.microchip.com/downloads/en/DeviceDoc/MCP6001-1R-1U-2-4-1-MHz-Low-Power-Op-Amp-DS20001733L.pdf, MFR Part #=MCP6002T-I/SN, Type=Basic
U5: library part U_MCP4725A0T-E/CH, "IC DAC 12BIT V-OUT SOT23-6", LCSC Part#=C144198, MFR Part #=MCP4725A0T-E/CH, Datasheet=https://ww1.microchip.com/downloads/en/DeviceDoc/22039d.pdf, Type=Extended
U6: library part U_ADC_ADS1115IDGSR, "16-Bit ADC with Integrated MUX, PGA, Comparator, Oscillator, and Reference 10-VSSOP -40 to 125", LCSC Part#=C37593, Package="MSOP-10 Texas Instruments", Digikey Link=https://www.digikey.com/product-detail/en/texas-instruments/ADS1115IDGSR/296-38849-1-ND/5142969?utm_source=snapeda&utm_medium=aggregator&utm_campaign=symbol, MFR Part #=ADS1115IDGSR, SnapEDA_Link=https://www.snapeda.com/parts/ADS1115IDGSR/Texas%20Instruments/view-part/?ref=snap, Type=Extended
Y1: library part X_12MHz_Res, "SMD Crystal Resonators 12MHz ±10ppm SMD-3225_4P RoHS", LCSC Part#=C9002, Datasheet=https://datasheet.lcsc.com/szlcsc/Yangxing-Tech-X322512MSB4SI_C9002.pdf, MFR Part #=X322512MSB4SI, Type=Basic
Y2: library part X_16Mhz_Res, "±10ppm 16000000Hz -40℃~85℃ 贴片无源晶振 60Ω 9pF SMD3225-4P Crystals ROHS", LCSC Part#=C13738, MFR Part #=X322516MLB4SI, Type=Basic

## Via types
v1: diameter 25, hole 13, Top Layer to Bottom Layer, 55 vias
v2: diameter 50, hole 28, Top Layer to Bottom Layer, 12 vias

## Nets (pads, with @x,y where several pads share a name; then routed paths per layer and width w, separated by ;. In a path a pad name is that pad's centre, name@x,y a point inside that pad or via, vN(x,y) a via of type N, cw(c..) or ccw(c..) an arc to the next point about the centre after c; other vN are vias at no path point)
3.3V: C1.2 J11.2 LED1.1 PS1.2 PS1.4 TP1.1 | length 2297
  Top Layer w10: v1(668,2316) 789,2316 LED1.1 807.5,2311 848.5,2270 C1.2 C1.2@1020.5,2270 ; PS1.4 1155.45,2404.95 C1.2@1020.5,2270 ; TP1.1 1504.12,2196.12 1504.12,2162.14 1432.71,2090.74 1360.34,2090.74 1319,2132.08 PS1.2 1319,2166.01 1307.5,2177.51 1270.71,2177.51 1178.22,2270 C1.2@1020.5,2270
  Bottom Layer w10: v1(668,2316) 646.11,2294.11 646.11,1578.89 J11.2
5V: C6.2 C7.2 C16.2 C17.2 C18.2 C19.1 C20.1 C21.1 D2.1 D3.1 D4.1 J2.4 L1.1 LED6.1 LED7.1 R1.2 R6.2 R12.1 R13.2 SW1.1 TP3.1 U1.4 U1.6 U2.16 U3.5 U4.8 U5.3 U6.8 | length 12994.1
  Top Layer w10: v1(699,407) 700,408 783,408 v1(784,409) 784,501.12 807,524.12 U6.8
  Top Layer w15: v1(468,900) 463,900 440,923 R6.2 554.5,998 L1.1 L1.1@559.5,1012.5 ; v1(509,1991) 492,1974 U2.16 520.87,1946 525.03,1950.16 525.03,1966.16 567.37,2008.5 586,2008.5 616.5,2039 C6.2 ; C7.2 841,1016.5 800.5,1057 604,1057 L1.1@559.5,1012.5 ; v1(1168.99,409.5) 1170.49,411.01 1170.49,453.99 1174.5,458 1174.5,493.23 1186.75,505.48 1221.25,505.48 1232.5,494.23 1232.5,458 U1.6 ; J2.4 1380.5,1137.5 1380.5,1206.75 1283.31,1303.94 1125.19,1303.94 1028,1401.13 1028,1454.97 1074.03,1501 1475.57,1501 1513.57,1539 ; R1.2 1346,2722 SW1.1 ; v1(1574,1902) 1543.52,1932.48 1510.22,1932.48 U3.5 1510.22,1940.32 1547.84,1940.32 1651.02,2043.5 1725.75,2043.5 1939.5,2257.25 1939.5,2300.75 1908.75,2331.5 1873.39,2331.5 1831.25,2331.5 1657.29,2505.46 1657.29,2538.71 SW1.1 ; TP3.1 1617,2722 SW1.1 ; v1(1751.44,1420.41) 1749.52,1418.49 1749.52,1378.52 LED7.1 LED6.1 1598,1455 1549,1504 1549,1514.43 1526.34,1537.09 1515.91,1537.09 1514,1539 1513.57,1539 ; v1(2084,1001) C20.1@2142.5,1001 ; v1(2138,1280) 2138,1327 C19.1 ; C21.1 2153,749 2129.62,772.38 2123.38,772.38 2100,795.75 2100,958.5 C20.1@2142.5,1001 ; C20.1 C20.1@2142.5,1001 ; D2.1 2348.25,1535.3 2308.75,1495.8 2308.75,1484.25 2159.5,1335 2174,1320.5 2174,1240.7 2252,1162.7 2314,1162.7 2338.87,1187.57 2338.87,1192.72 2363.75,1217.6 D3.1 2410,1203.95 2451.25,1162.7 2451.25,960.35 2441,950.1 2433.65,950.1 2399.5,915.95 D4.1 ; L1.1@559.5,1012.5 559.5,1804.5 v1(559,1805) 749.9,1805 1015.9,1539 1513.57,1539
  Bottom Layer w10: v1(784,409) 784.25,409.25 1168.74,409.25 v1(1168.99,409.5)
  Bottom Layer w15: U5.3 349.11,204.4 345,208.52 345,285.43 ; 433.75,306 492.25,306 724,537.75 724,704.25 693,735.25 693,873.75 746.25,927 753.25,927 792.5,966.25 792.5,1051.75 782.25,1062 630,1062 v1(468,900) ; C18.2 463,780.5 345,662.5 C16.2 345,285.43 ; v1(509,1991) 559,1941 v1(559,1805) ; v1(699,407) 699,316.1 750,265.1 R13.2 743,197 588,197 R12.1 565.5,206 468.5,303 362.57,303 345,285.43 ; v1(1341,1501) 1311,1531 1311,1694.25 1440.42,1823.67 1495.67,1823.67 v1(1574,1902) ; v1(1751.44,1420.41) 1754.14,1420.41 1777.27,1397.28 1779.47,1397.28 1792.25,1384.5 1838.75,1384.5 1907.75,1315.5 1916,1315.5 C17.2@1961.5,1270 ; U4.8 1809.3,1035 1880.31,1106.01 1880.31,1188.81 C17.2@1961.5,1270 ; v1(2084,1001) 2084,1070.57 2138,1124.57 v1(2138,1280) ; 2135.13,1232.77 2107.36,1205 2040,1205 2003,1242 2003,1255.5 1988.5,1270 C17.2 C17.2@1961.5,1270
5V_power_jack: C3.2 LED2.1 P1.1 SW2.1 TP4.1 | length 1581.1
  Top Layer w15: TP4.1 298,2331 P1.1 298,2527.5 620.5,2850 C3.2 637.5,2853.5 790.5,2853.5 LED2.1 1259,2857 SW2.1
5V_USB: C4.2 J1.1 LED3.1 SW2.3 | length 1327.6
  Top Layer w15: SW2.3 1987.02,2896 2063.22,2819.8 2205.2,2819.8 2271.84,2753.17 2271.84,2707.1 2262.2,2697.47 J1.1 2352,2598.95 LED3.1 2169,2487 C4.2
CH_XTAL1: C9.2 R5.1 U2.8 Y1.1 | length 506.2
  Top Layer w6: U2.8 238.01,1596 229.69,1587.69 229.69,1549.01 201.72,1521.03 185.16,1521.03 185.16,1518.03 Y1.1@175.16,1508.03 ; R5.1 246.25,1286 239.36,1292.89 239.36,1297.14 218.14,1297.14 C9.2 211,1394.45 203,1402.45 203,1494.52 199.49,1498.03 Y1.1@185.16,1498.03 ; Y1.1@175.16,1508.03 Y1.1 175.16,1498.03 Y1.1@185.16,1498.03 ; Y1.1@175.16,1508.03 Y1.1@185.16,1498.03
CH_XTAL2: C10.2 R5.2 U2.7 Y1.3 | length 689
  Top Layer w6: Y1.3 88.78,1609.84 129.34,1650.4 217.42,1650.4 221.82,1646 U2.7 289.31,1646 314.31,1621 314.31,1516.31 314,1516 314,1494 v1(312,1492) ; v1(398,1483) 398,1419 406,1411 R5.2
  Bottom Layer w6: v1(312,1492) 329,1475 356.93,1475 364.93,1483 v1(398,1483)
D8: BZ1.2 U1.12 | length 2294
  Top Layer w6: BZ1.2 1495.84,1428.05 1538.68,1385.21 1538.68,1351.44 1570.62,1319.5 1766.38,1319.5 1798,1351.12 1798,1384.88 1829.62,1416.5 1999.38,1416.5 2039.88,1376 2062.51,1376 2079.5,1359.01 2079.5,1290.99 2033.45,1244.94 1977.05,1244.94 1931,1198.88 1931,1055.12 1858,982.12 1813,982.12 1581.88,751 1546.12,751 1408.19,613.07 1363.5,613.07 U1.12
D9: R23.2 U1.13 | length 1033.9
  Top Layer w6: U1.13 1396.07,638.07 1518,760 1518,863.39 1563.76,957.65 1806,1199.88 1806,1217.56 1820.94,1232.5 1838.62,1232.5 1912.12,1306 1996,1306 R23.2
D11/MOSI: J2.5 U1.15 | length 520.2
  Top Layer w6: U1.15 1363.5,708.07 1388.5,708.07 1389.5,709.07 1394.37,709.07 1401.98,716.69 1401.98,876.67 1404.5,879.18 1404.5,952.5 v1(1389,968)
  Bottom Layer w6: J2.5 1345,968 v1(1389,968)
D12/MISO: J2.1 U1.16 | length 579.5
  Top Layer w6: J2.1 1280,1137 1280,1018.63 1354.13,944.5 1364.19,944.5 1388.5,920.19 1388.5,885.81 1382,879.31 1382,859.67 1321,798.67 1321,745.09 1334.02,732.07 U1.16
D13/SCK: J2.2 U1.17 | length 547
  Top Layer w6: J2.2 1180,1137 1180,1065.12 1221.57,1023.55 1249.08,1023.55 1344.13,928.5 1357.56,928.5 1372.5,913.56 1372.5,892.44 1366,885.94 1366,882.98 1298,814.98 U1.17
D+: J1.3 LED4.1 TP5.1 U2.5 U3.1 | length 4796.7
  Top Layer w6: U2.5 284.44,1746 292.75,1754.31 292.75,1763.41 369.87,1840.53 ; U3.1 1351.94,1973.8 1345.94,1973.8 1335.74,1984 1331.74,1988 684.14,1988 575.86,1988 548.31,1960.45 548.31,1935.64 533.66,1921 450.34,1921 369.87,1840.53 ; J1.3 2115.5,2605.03 2115.5,2056.62 2164,2008.12 LED4.1 ; TP5.1 2295,1966 LED4.1 ; 369.87,1840.53 369.87,1814.47 295.36,1739.95 289.41,1734 229.34,1734 201.69,1706.36 201.69,1703 201.69,1685.64 216.34,1671 255.63,1671 300.34,1671 450.34,1821 533.66,1821 581.5,1868.84 581.5,1948.38 589.12,1956 670.88,1956 686.88,1940 743.12,1940 757.12,1954 838.88,1954 941.88,1851 1756.88,1851 1859.88,1954 2152,1954 LED4.1
D-: J1.2 LED5.1 TP6.1 U2.6 U3.3 | length 3042.2
  Top Layer w6: U2.6 289.31,1696 410.94,1817.63 410.94,1831.6 450.34,1871 533.66,1871 564.31,1901.64 564.31,1931.19 565.5,1932.38 565.5,1955.01 582.49,1972 677.51,1972 693.51,1956 736.49,1956 750.49,1970 845.51,1970 859.51,1956 950.54,1956 1007.54,1899 U3.3 1451.6,1899 1476.02,1874.58 1634.65,1874.58 1646.06,1886 LED5.1 1729.5,1886 1849.5,2006 TP6.1 1965,2268.88 1960,2273.88 1960,2309.24 1917.24,2352 1881.88,2352 1857,2376.88 1857,2499.74 1949.86,2592.6 1997.31,2592.6 2090.17,2685.45 2090.17,2710.37 2152.56,2772.76 2194.09,2772.76 J1.2
DAC_o/p: TP10.1 U4.3 U5.1 | length 2962.8
  Top Layer w6: TP10.1 206,86 294.5,86 300.59,79.91 315.36,79.91 v1(319,76.28)
  Bottom Layer w6: v1(319,76.28) 320.63,77.91 320.63,97.78 331.13,108.27 331.13,120.98 339.75,129.6 350.31,129.6 U5.1 ; U5.1@331.13,119.21 327.72,119.21 310,136.93 310,716.88 442.5,849.38 442.5,910.56 614.44,1082.5 790.74,1082.5 813,1060.24 813,957.76 713.5,858.26 713.5,812.44 729.44,796.5 924.82,796.5 1015.5,887.18 1015.5,893.6 1180,1058.1 1180,1104.88 1210.12,1135 U4.3
DTR: C11.1 U2.13 | length 1418.3
  Top Layer w6: C11.1 371,634.44 395,658.44 395,1043.16 365,1073.16 365,1700.31 460.69,1796 U2.13
GND: BZ1.1 C1.1 C2.1 C3.1 C4.1 C5.1 C6.1 C7.1 C8.1 C9.1 C10.1 C12.1 C13.1 C14.1 C16.1 C17.1 C18.1 C19.2 C20.2 C21.2 D2.3 D3.3 D4.3 J1.5 J1.6 J1.7 J1.8 J1.9 J2.6 J11.1 P1.2 P1.3 P2.2 P2.3 P3.2 PS1.1 R2.1 R3.1 R4.1 R7.1 R8.1 R15.1 R20.1 R21.1 R22.1 SW3.3 SW3.4 TP1.2 TP2.2 TP3.2 TP4.2 TP5.2 TP6.2 TP7.2 TP8.2 TP9.2 TP10.2 U1.3 U1.5 U1.21 U2.1 U3.2 U4.4 U4.5 U4.6 U5.2 U5.6 U6.3 Y1.2 Y1.4 Y2.2 Y2.4 | length 9270
  Top Layer w6: v1(80.16,1421.03) 80.16,1489.41 Y1.4 88.78,1505.91 140.6,1557.72 140.6,1577.41 Y1.2 ; C9.1 94,1289 94,1099.25 115,1078.25 115,1076 TP7.2@128,1076 ; C8.1 116,1946 U2.1 262,1950 TP4.2@262,2167 ; v2(241,1470) 242.5,1470 282,1430.5 C10.1 ; C12.1 497,743 C12.1@497,729.5 ; v1(513,570) 513,581.91 497,597.91 C12.1@497,729.5 ; SW3.4 592.08,543.11 668,619.04 C5.1 573.5,715 559,729.5 C12.1@497,729.5 ; C6.1 796,1921 R2.1 799,1918 v2(799,1816) 931.05,1683.95 BZ1.1 ; C3.1 632,2730 v2(632,2574) 735,2471 770,2471 R3.1 ; v1(802.97,725.03) 805,727.06 805,746.12 807,748.12 U6.3 ; v1(896.5,526.03) 896.5,520.89 889.59,513.98 889.59,503.81 857.83,472.06 SW3.3 860.56,463.41 860.56,437.44 930,368 981,368 C13.1 1013.5,349 1047.28,315.22 1154.03,315.22 Y2.4 ; C7.1 1011,1003 v1(1041.08,972.92) ; TP2.2@1003,2605 1198,2605 1217,2586 C2.1 ; C1.1 1020.5,2152 1121.5,2051 v2(1123,2051) 1190.58,2118.58 1214.5,2118.58 1228,2132.08 PS1.1 ; U1.3 1141,433.02 1132,424.02 1132,417.63 1108,393.63 1108,387.51 1111.51,384 1194.75,384 1202.91,375.84 ; U1.21 v1(1172,857) ; Y2.4@1178.35,293.22 1196.75,311.63 1196.75,333.63 1202.91,339.78 1202.91,375.84 ; U1.5 1202.91,454.4 1202.91,375.84 ; Y2.2 1301.97,238.84 v2(1395.41,238.84) 1511.84,238.84 C14.1 ; v2(1320,1946) 1364.28,1946 1373.88,1936.4 U3.2 ; v2(1627.5,1605.82) 1639.41,1605.82 1649.23,1596 1697,1596 R8.1 ; P3.2 1849.9,260.9 v2(1915,326) ; v2(1895,2484) C4.1 2049,2483 R4.1 ; TP6.2@1965,1706 2091.5,1706 R7.1@2150.5,1647 ; v2(2072,1647) R7.1@2150.5,1647 ; v1(2094,1123) 2152,1123 C20.2 2156,1081 2164,1073 2215.85,1073 2249.45,1039.4 2262.25,1039.4 2283,1018.65 D3.3 ; C19.2 2146,1629 R7.1 ; C21.2 2166.5,825 2210,781.5 2210,676.91 2185,651.91 v2@2185,647.73 ; v2(2187,647.73) 2192.73,647.73 2234.7,689.7 D4.3 ; D2.3 2267.5,1336.35 2355.96,1424.81 2363.54,1424.81 2431.25,1492.51 2431.25,1687.75 2374,1745 2276,1647 R7.1 ; P2.3 2317.07,244.43 2401.5,160 R15.1 ; R7.1@2150.5,1647 R7.1
  Bottom Layer w6: U5.2 377,167 389.79,154.21 392.3,154.21 408.3,138.21 438.46,138.21 U5.6 447.08,91.83 455,83.9 458.19,83.9 475.09,67 484.37,76.28 v1(487,76.28) ; C16.1 463,520 v1(513,570) 513,712.5 581,780.5 C18.1 581,837 720.5,976.5 734,976.5 753,995.5 R20.1 ; v1(1041.08,972.92) 1046.92,972.92 1115.75,1041.75 1115.75,1072.75 J2.6 ; R21.1 1484.12,1600 1516.12,1568 1597.88,1568 1627.5,1597.62 v2(1627.5,1605.82) ; v1(1550,1225) 1565.2,1209.8 1565.2,1193.81 1574.01,1185 U4.4 ; U4.6 1798.92,1143.32 1825.32,1143.32 1845,1163 1845,1196 1834,1185 U4.5 ; v1(1831.5,1207) 1843.75,1194.75 ; C17.1 1988.5,1152 2007.5,1133 2007.5,1055.5 v1(2015,1048) 2090,1123 v1(2094,1123) ; v2(2092.63,1250.37) 2086,1257 2086,1284.37 2083,1287.37 2083,1351 R22.1
MCU_RESET: C11.2 C12.2 J2.3 R6.1 SW3.1 SW3.2 TP7.1 U1.29 | length 3019.4
  Top Layer w6: R6.1 322,984.5 128,790.5 TP7.1 129,775 322.1,775 332.51,764.58 357.42,764.58 C12.2 360,748.5 322.5,711 322.5,443.19 338.5,427.19 338.5,372 357.5,353 C11.2 371.94,353.94 SW3.2 SW3.1 851.92,400.52 809.39,443.05 809.39,501.06 817.01,508.68 836.68,508.68 v1@892,564 ; v1(884.37,712.63) 884.37,715.04 898.37,729.04 898.37,744.84 1070.22,916.7 1297.19,916.7 1300.7,920.22 1300.7,940.3 1276.33,968.63 ccw(c1257,952) 1274.01,971 1233.45,1007.55 1137.57,1007.55 1080,1065.12 1080,1104.88 1108.12,1133 1131.88,1133 1139.88,1141 1139.88,1173.12 J2.3 ; v1(895,561) 935.13,561 973.2,599.07 1012.5,599.07 U1.29
  Bottom Layer w6: v1@886.92,710.08 v1(884.37,712.63) 884.37,598.59 895,587.95 v1(895,561)
MCU_RX: R10.1 TP8.1 U1.30 U2.2 | length 5034.1
  Top Layer w6: v1(43,1895) 43.5,1895.5 257.5,1895.5 U2.2 ; U1.30 1012.5,568.07 983.63,568.07 958.02,542.46 958.02,388.98 963,384 1040.88,384 1048.5,376.38 1048.5,365.51 1082.79,331.22 1132.65,331.22 1135.21,333.78 1161.34,333.78 1173.36,345.81 v1(1174.35,345.81) ; v1(1337,435) 1340.3,435 1445.49,540.19 1445.49,550.37 1546.12,651 1581.88,651 1614,683.12 1614,752 1651.18,789.18 1660.18,789.18 v1(1701,830) ; v1(1528,947) 1598,1017 R10.1 ; TP8.1 1638.36,875.36 1652.36,875.36 v1(1656,879) 1629,906 1612,906 v1(1585,933)
  Bottom Layer w6: v1(43,1895) 43,993.12 108.12,928 143.88,928 212.71,859.17 212.71,103.6 281.53,34.78 797.29,34.78 1088.51,326 1154.54,326 v1(1174.35,345.81) ; v1@1174.77,346.23 1175.19,345.81 1292.87,345.81 1337,389.94 v1(1337,435) ; v1(1528,947) 1530.41,947 1544.41,933 v1(1585,933) ; v1(1656,879) 1656,877 1701,832 v1(1701,830)
MCU_TX: R11.1 TP9.1 U1.31 U2.3 | length 5047.6
  Top Layer w6: U2.3 173.88,1846 150.88,1869 44,1869 23,1848 23,201.12 173.34,50.78 768.78,50.78 v1(846,128) ; U1.31 1012.5,536.07 982.63,536.07 974.02,527.46 974.02,403.51 977.53,400 1047.51,400 1090.56,356.95 v1(1124.56,356.95) ; v1(1303,392) 1305.5,394.5 1324.5,394.5 1339.5,409.5 1347.56,409.5 1466.06,528 1524.27,528 1526.03,529.76 1526.41,530.14 cw(c1566,503) 1605.59,530.14 1605.97,529.76 1607.73,528 1786.62,528 1788.38,529.76 1789.05,530.43 cw(c1832,509) 1826.92,556.73 ccw(c1826.24,562.69) 1829.12,557.43 1834.88,560.57 cw(c1837.76,555.31) 1837.1,561.27 ccw(c1831.62,612.56) 1857.9,656.94 cw(c1860.96,662.11) 1858.22,667.45 ccw(c1836.67,710.34) 1884.08,717.82 ccw(c1827.84,708.94) 1835.16,765.4 1833.78,766.79 ; v1(1700,952) 1778,1030 R11.1 ; TP9.1 1832,768.57 1833.76,766.81
  Bottom Layer w6: v1(846,128) 1060,342 1109.61,342 1125,357.39 1125,363.49 1128.51,367 1160.17,367 cw(c1174.35,345.81) 1188.53,367 1278,367 v1(1303,392) ; v1(1700,952) 1700,946.86 1832,814.86 TP9.1
MCU_XTAL1: C13.2 R9.1 U1.7 Y2.1 | length 611.8
  Top Layer w6: R9.1 1232,154 1232,183.43 1224.71,190.73 1224.71,212.6 1222.46,214.84 1220.46,216.84 ; U1.7 1267,433.02 1260,426.02 1260,419.63 1250.38,410.02 1231.79,410.02 1218.91,397.13 1218.91,331.72 1224.46,326.16 1224.46,220.84 1220.46,216.84 ; C13.2@1007.84,238.84 C13.2 C13.2@1007.84,238.84 ; C13.2@1007.84,238.84 1154.03,238.84 Y2.1 1220.46,216.84
MCU_XTAL2: C14.2 R9.2 U1.8 Y2.3 | length 950.9
  Top Layer w6: U1.8 1291,448.5 1291,423.5 1290,422.5 1290,417.63 1266.38,394.02 1238.42,394.02 1234.91,390.5 1234.91,359.35 1239.46,354.79 1239.46,354.72 1257.92,336.27 1257.92,315.27 Y2.3 1304.4,317.65 1304.4,332.78 1339.62,368 C14.2 1572.29,368 1575.8,364.49 1575.8,226.92 1563.88,215 1435.5,215 1369,148.5 R9.2
NetC2_2: C2.2 PS1.3 SW1.2 | length 679.2
  Top Layer w6: PS1.3 1468,2197.2 1468,2438.5 1335,2571.5 C2.2 1437,2585 SW1.2
NetC5_2: C5.2 L1.2 U1.18 | length 930.6
  Top Layer w6: C5.2 682.5,847.5 682.5,965.5 ; L1.2 682.5,993.5 682.5,965.5 ; v1(1257,952) 1235.97,938 1233.48,938 710,938 682.5,965.5 ; U1.18 1268,793.5 v1(1268,865)
  Bottom Layer w6: v1(1257,952) 1257,881.14 1268,870.14 v1(1268,865)
NetC8_2: C8.2 U2.4 | length 163.7
  Top Layer w6: C8.2 123.5,1834 161.5,1796 U2.4
NetD2_4: D2.4 D3.2 | length 177
  Top Layer w6: D3.2 2303.75,1238.35 2303.75,1262.2 2329.85,1288.3 2373.75,1288.3 2394.5,1309.05 D2.4
NetD3_4: D3.4 D4.2 | length 188
  Top Layer w6: D4.2 2272.5,915.95 2311.15,954.6 2325,954.6 2375.4,1005 D3.4
NetD4_4: D4.4 R23.1 | length 752.4
  Top Layer w6: R23.1 2015,1176 2068.5,1122.5 2068.5,1042.5 2075,1036 2196.88,1036 2225.92,1006.96 2225.92,869.34 2302.96,792.31 2310.54,792.31 2399.5,703.35 D4.4
NetLED1_2: LED1.2 R2.2 | length 157.7
  Top Layer w6: LED1.2 794,2041 R2.2
NetLED2_2: LED2.2 R3.2 | length 171.1
  Top Layer w6: R3.2 794,2575 LED2.2
NetLED3_2: LED3.2 R4.2 | length 197.8
  Top Layer w6: R4.2 2307.5,2338 2338.5,2369 LED3.2
NetLED4_2: LED4.2 R7.2 | length 737.5
  Top Layer w6: R7.2 2177.5,1765 2305.5,1893 2389.88,1893 2422,1925.12 2422,2064.88 2393.88,2093 2299.69,2093 2290.69,2084 LED4.2
NetLED5_2: LED5.2 R8.2 | length 440.1
  Top Layer w6: v1(1632,1820) 1632,1750 1675.01,1706.99 1704.01,1706.99 R8.2 ; v1(1633,1909) 1633.49,1909 1637,1912.51 1637,2000.49 1640.51,2004 LED5.2
  Bottom Layer w6: v1(1632,1820) 1633,1821 v1(1633,1909)
NetLED6_2: LED6.2 R10.2 | length 259
  Top Layer w6: R10.2 LED6.2
NetLED7_2: LED7.2 R11.2 | length 631
  Top Layer w6: LED7.2 1857,1323.5 1860.51,1319.99 1903.47,1319.99 1943.49,1360 2055.88,1360 2063.5,1352.38 2063.5,1297.62 2026.82,1260.94 1970.42,1260.94 1915,1205.51 1915,1115 R11.2
NetLED8_2: LED8.2 R15.2 | length 142.6
  Top Layer w6: R15.2 2415,405 LED8.2
NetP2_1: P2.1 SW4.1 | length 1210.9
  Top Layer w6: SW4.1 1194.83,87 1215.33,66.5 1463.5,66.5 1576,179 1578.8,179 1639.4,239.6 1639.4,242.4 1700,303 1712,303 1765,356 1884,356 2065.3,537.3 2120.08,537.3 P2.1
NetP3_1: P3.1 SW4.3 | length 839.4
  Top Layer w6: SW4.3 979.48,41.52 1461.15,41.52 1563.63,144 P3.1
NetQ1_1: Q1.1 U4.1 | length 479.1
  Bottom Layer w6: U4.1 1596.7,1035 1605.51,1043.81 1605.51,1051.8 1637.51,1083.8 1637.51,1275.61 1684.88,1322.98 1694.92,1322.98 1705.94,1334 1705.94,1361.2 1684.13,1383 1684.13,1414 1675.73,1422.4 Q1.1
NetR1_1: R1.1 SW2.2 TP2.1 | length 779.9
  Top Layer w15: TP2.1 1076.89,2478.89 1193.14,2478.89 1256.5,2542.25 1256.5,2627.75 1214,2670.25 R1.1 1214,2749.5 1228.5,2764 1266,2764 SW2.2
NetR18_2: R18.2 SW5.1 | length 702
  Bottom Layer w6: R18.2 1707,1256 1707,1057.89 1793.85,971.04 1966.96,971.04 SW5.1
NetR19_2: R19.2 SW5.3 | length 962.4
  Bottom Layer w6: R19.2 1964.5,1355 2006.5,1397 2134.88,1397 2173,1358.88 2173,1068 2140.5,1035.5 2140.5,990.5 2108,958 2108,796 SW5.3
NetR20_2: R20.2 U6.1 | length 241.5
  Top Layer w6: U6.1 846.37,810.25 883,846.88 v1(883,906)
  Bottom Layer w6: R20.2 883,997 v1(883,906)
SCL: J11.3 R12.2 U1.28 U5.5 U6.10 | length 3223.7
  Top Layer w6: U6.10 846.37,637.09 849.28,640 v1(935,640) 936.93,638.07 U1.28
  Bottom Layer w6: U5.5 485.15,167 540.5,111.65 540.5,91 R12.2@554.5,77 ; J11.3 252.5,991.5 252.5,86.44 288.16,50.78 528.28,50.78 R12.2@554.5,77 ; v1(935,640) 938,637 938,508.84 883.99,454.83 793.77,454.83 758.5,419.56 758.5,336.03 814.5,280.03 814.5,74.62 790.88,51 611.01,51 604.5,57.51 604.5,69 585.5,88 R12.2 565.5,88 559.5,82 R12.2@554.5,77
SDA: J11.4 R13.1 U1.27 U5.4 U6.9 | length 2918
  Top Layer w6: v1(278,253) 355,253 v1(375,273) ; U6.9 827.46,615.17 827.46,648.71 838.83,660.07 867.87,660.07 878.93,671.13 907.3,671.13 v1@931.59,695.41 ; v1(935.18,699.01) v1@931.59,695.41 ; U1.27 997.02,669.07 988.02,678.07 948.93,678.07 938.82,688.18 938.82,690.23 933.64,695.41 v1@931.59,695.41
  Bottom Layer w6: v1(278,253) 278,917 J11.4 ; v1(375,273) 378.64,269.36 378.64,252.77 427,204.4 485.15,204.4 508.63,180.92 508.63,178.48 532.12,155 587.88,155 627.5,115.38 627.5,93.38 648.88,72 749.5,72 798.5,121 798.5,245.6 742.5,301.6 742.5,426.19 787.14,470.83 877.36,470.83 922,515.47 922,602.21 921.3,603.53 905.92,632.56 905.92,674.89 930.04,699.01 v1(935.18,699.01)
v_current: Q1.2 SW5.2 U4.2 U6.4 | length 3281.4
  Top Layer w6: U6.4 787.32,828.32 v1(815,856)
  Bottom Layer w6: v1(815,856) 838,879 873.01,879 910.01,842 947.69,842 999.5,893.81 999.5,1124.38 1108.12,1233 1347.88,1233 1420.69,1160.19 1542.1,1160.19 ; U4.2 1596.7,1085 1621.51,1109.81 1621.51,1152.2 ; Q1.2 1651.4,1347.6 1621.51,1317.71 1621.51,1152.2 ; SW5.2 1929.26,813 1691,1051.26 1691,1278.19 1699.79,1286.98 1709.83,1286.98 1741.94,1319.09 1741.94,1376.11 1725.94,1392.11 1725.94,1540.05 1755,1569.12 1755,1650.88 1747.38,1658.5 1692.62,1658.5 1681.5,1647.38 1681.5,1583.46 1559.41,1461.36 1559.41,1438.73 1522.06,1401.39 1522.06,1180.23 1542.1,1160.19 ; 1542.1,1160.19 1613.52,1160.19 1621.51,1152.2
v_current_GND: R18.1 R19.1 R22.2 U6.5 | length 2516.7
  Top Layer w6: v1(739,823) 744.14,823 753.59,813.55 764.72,813.55 767.63,810.65 U6.5
  Bottom Layer w6: v1(739,823) 759.97,843.97 770.97,843.97 789.5,862.5 789.5,911.63 829,951.13 829,1042.88 843.62,1057.5 898.38,1057.5 910,1045.88 910,864.64 913.51,861.12 944.18,861.12 983.5,900.44 983.5,1131.01 1137.16,1284.67 1382.71,1284.67 1543.41,1445.36 1543.41,1467.99 1665.5,1590.08 1665.5,1654.01 1685.99,1674.5 1754.01,1674.5 1771,1657.51 1771,1562.49 1755.01,1546.5 1755.01,1490.49 1782.5,1463 1941,1463 R19.1 2087,1473 R22.2
v_thevenin: LED8.1 Q1.3 R14.2 SW4.2 | length 4191
  Top Layer w10: SW4.2 1034,118 1091.48,175.48 1131.81,175.48 1222.79,84.5 1436.21,84.5 1548.71,197 1571.34,197 1621.4,247.06 1621.4,323.4 1678,380 1847.54,380 1914,446.46 1914,579 1944,609 2140.75,609 2142.02,607.73 2338.77,607.73 2412.5,534 LED8.1
  Bottom Layer w10: SW4.2 1081.48,39.52 1252.65,39.52 1435.41,222.27 1435.41,443.12 1545.29,553 1586.71,553 1623.51,589.8 1623.51,1044.35 1665.72,1086.56 1665.72,1278.37 1692.34,1304.98 1702.38,1304.98 1723.94,1326.55 1723.94,1368.65 1707.94,1384.65 1707.94,1436.83 1695.75,1449.02 1636.98,1449.02 1615.09,1427.13 1615.09,1411.02 1593.21,1389.14 1577.41,1389.14 1565.77,1389.14 Q1.3 ; Q1.3@1574.99,1389.14 1577.41,1391.55 1577.41,1453.91 1720,1596.5 R14.2
v_vrm: R14.1 R16.2 R17.2 U6.6 | length 3170.5
  Top Layer w6: U6.6 768.41,615.17 768.41,648.71 776.02,656.32 792.95,656.32 823.76,687.13 894.93,687.13 909.87,702.07 909.87,709.76 1100.11,900 1344,900 v1(1347,903) ; v1(1430,901) 1430,1186.24 1232.69,1383.55 1074.57,1383.55 1048.5,1409.62 1048.5,1446.48 1074.57,1472.54 1111.43,1472.54 1111.76,1472.21 1489.21,1472.21 v1(1519,1502)
  Bottom Layer w6: v1(1347,903) 1428,903 v1(1430,901) ; v1(1519,1502) 1548.26,1502 1589.78,1543.51 1589.78,1548.49 1586.26,1552 1389.12,1552 1368.5,1572.62 1368.5,1627.38 1385.12,1644 1502.5,1644 1543.5,1603 R17.2 1570.5,1603 1671,1703.5 1743.38,1703.5 1791.88,1752 R16.2 1834,1614 R14.1
v_vrm_GND: R16.1 R17.1 R21.2 U6.7 | length 1879.9
  Top Layer w6: U6.7 786.54,613.61 786.54,580.06 778.92,572.45 756.34,572.45 748.72,580.06 748.72,651.65 796.61,699.53 813.53,699.53 958,844 958,869.93 937.93,890 v1(937,890)
  Bottom Layer w6: v1(937,890) 937,1107.14 1139.15,1309.29 1185.35,1309.29 1366.5,1490.44 1366.5,1551.99 1352.5,1565.99 1352.5,1634.01 1378.99,1660.51 1390.51,1660.51 1417,1687 R21.2 1554,1718 R17.1 1570.5,1721 1601.5,1752 R16.1
pads on no net: D2.2 J1.4 U1.1 U1.2 U1.9 U1.10 U1.11 U1.14 U1.19 U1.20 U1.22 U1.23 U1.24 U1.25 U1.26 U1.32 U2.9 U2.10 U2.11 U2.12 U2.14 U2.15 U3.4 U3.6 U4.7 U6.2

## Polygon pours and split planes (outlines as drawn)
GND on Int1 (GND) "GND_L02_P000" (solid, pour order 0): 2,2994 7,2999 2500,2999 2500,8 2505,3 7,3
GND on Int2 (GND) "GND_L03_P001" (solid, pour order 1): 2,2994 2500,2994 2505,2989 2494,2978 2494,8 -3,8 -8,13

## Keep-outs
Keep-Out Layer:
  the board outline again, w20